# Altium PCB PCB1.PcbDoc (part 1 of 2)
Units mm, origin at the board's own origin, x right, y up, seen from the top; angles counter-clockwise.
Board outline 85.47 x 84.33 mm, 4 copper layers (Top Layer, Internal Plane 1, Internal Plane 2, Bottom Layer); 65 components, 57 nets, 335 pads, 113 vias.
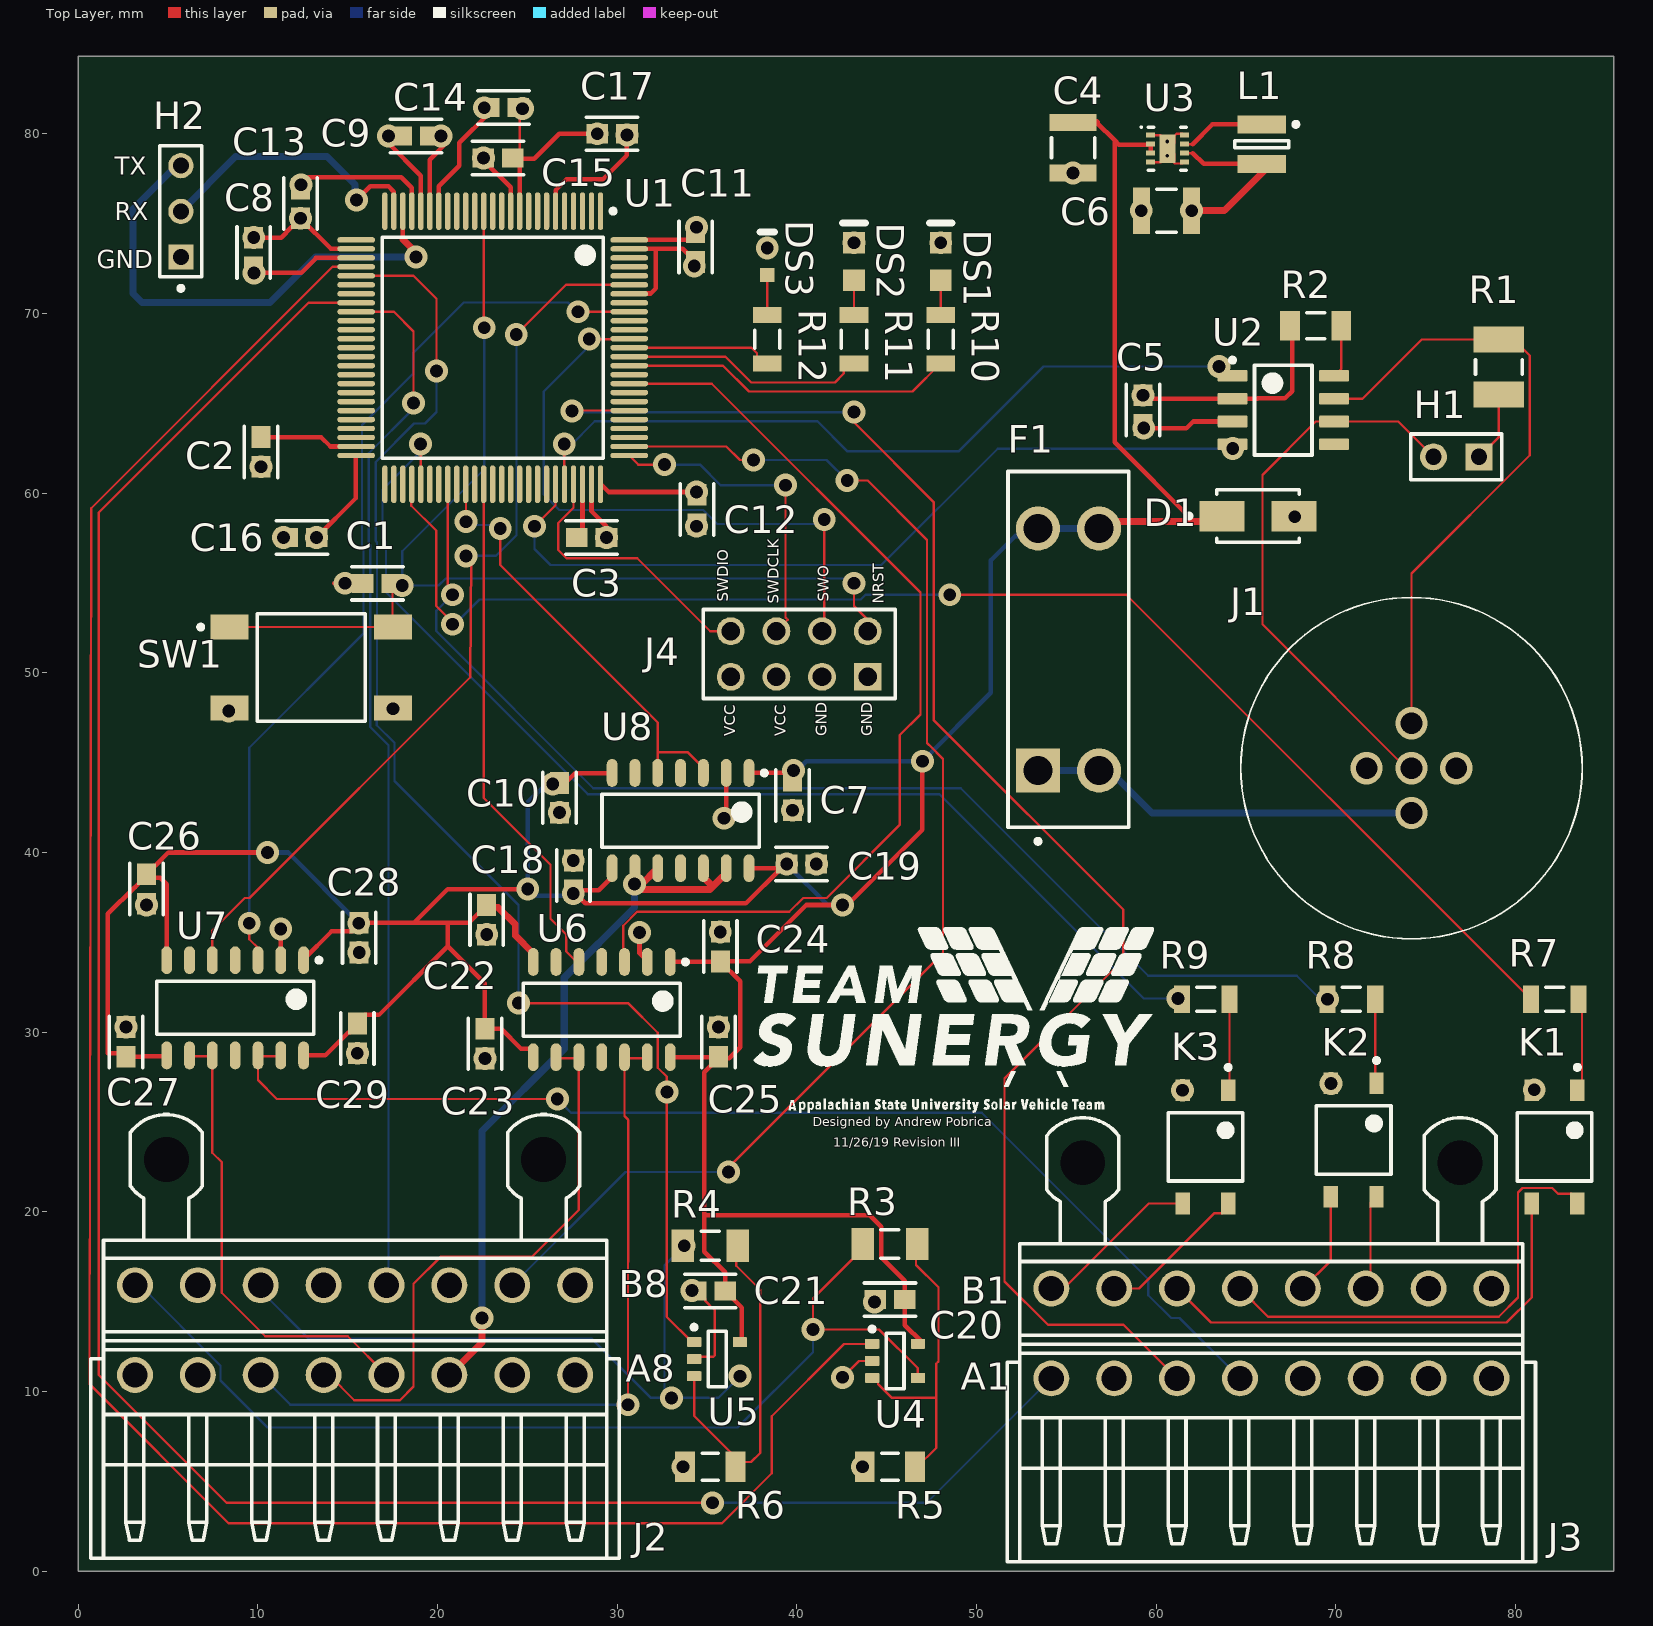
[diagram p0: Top Layer view]
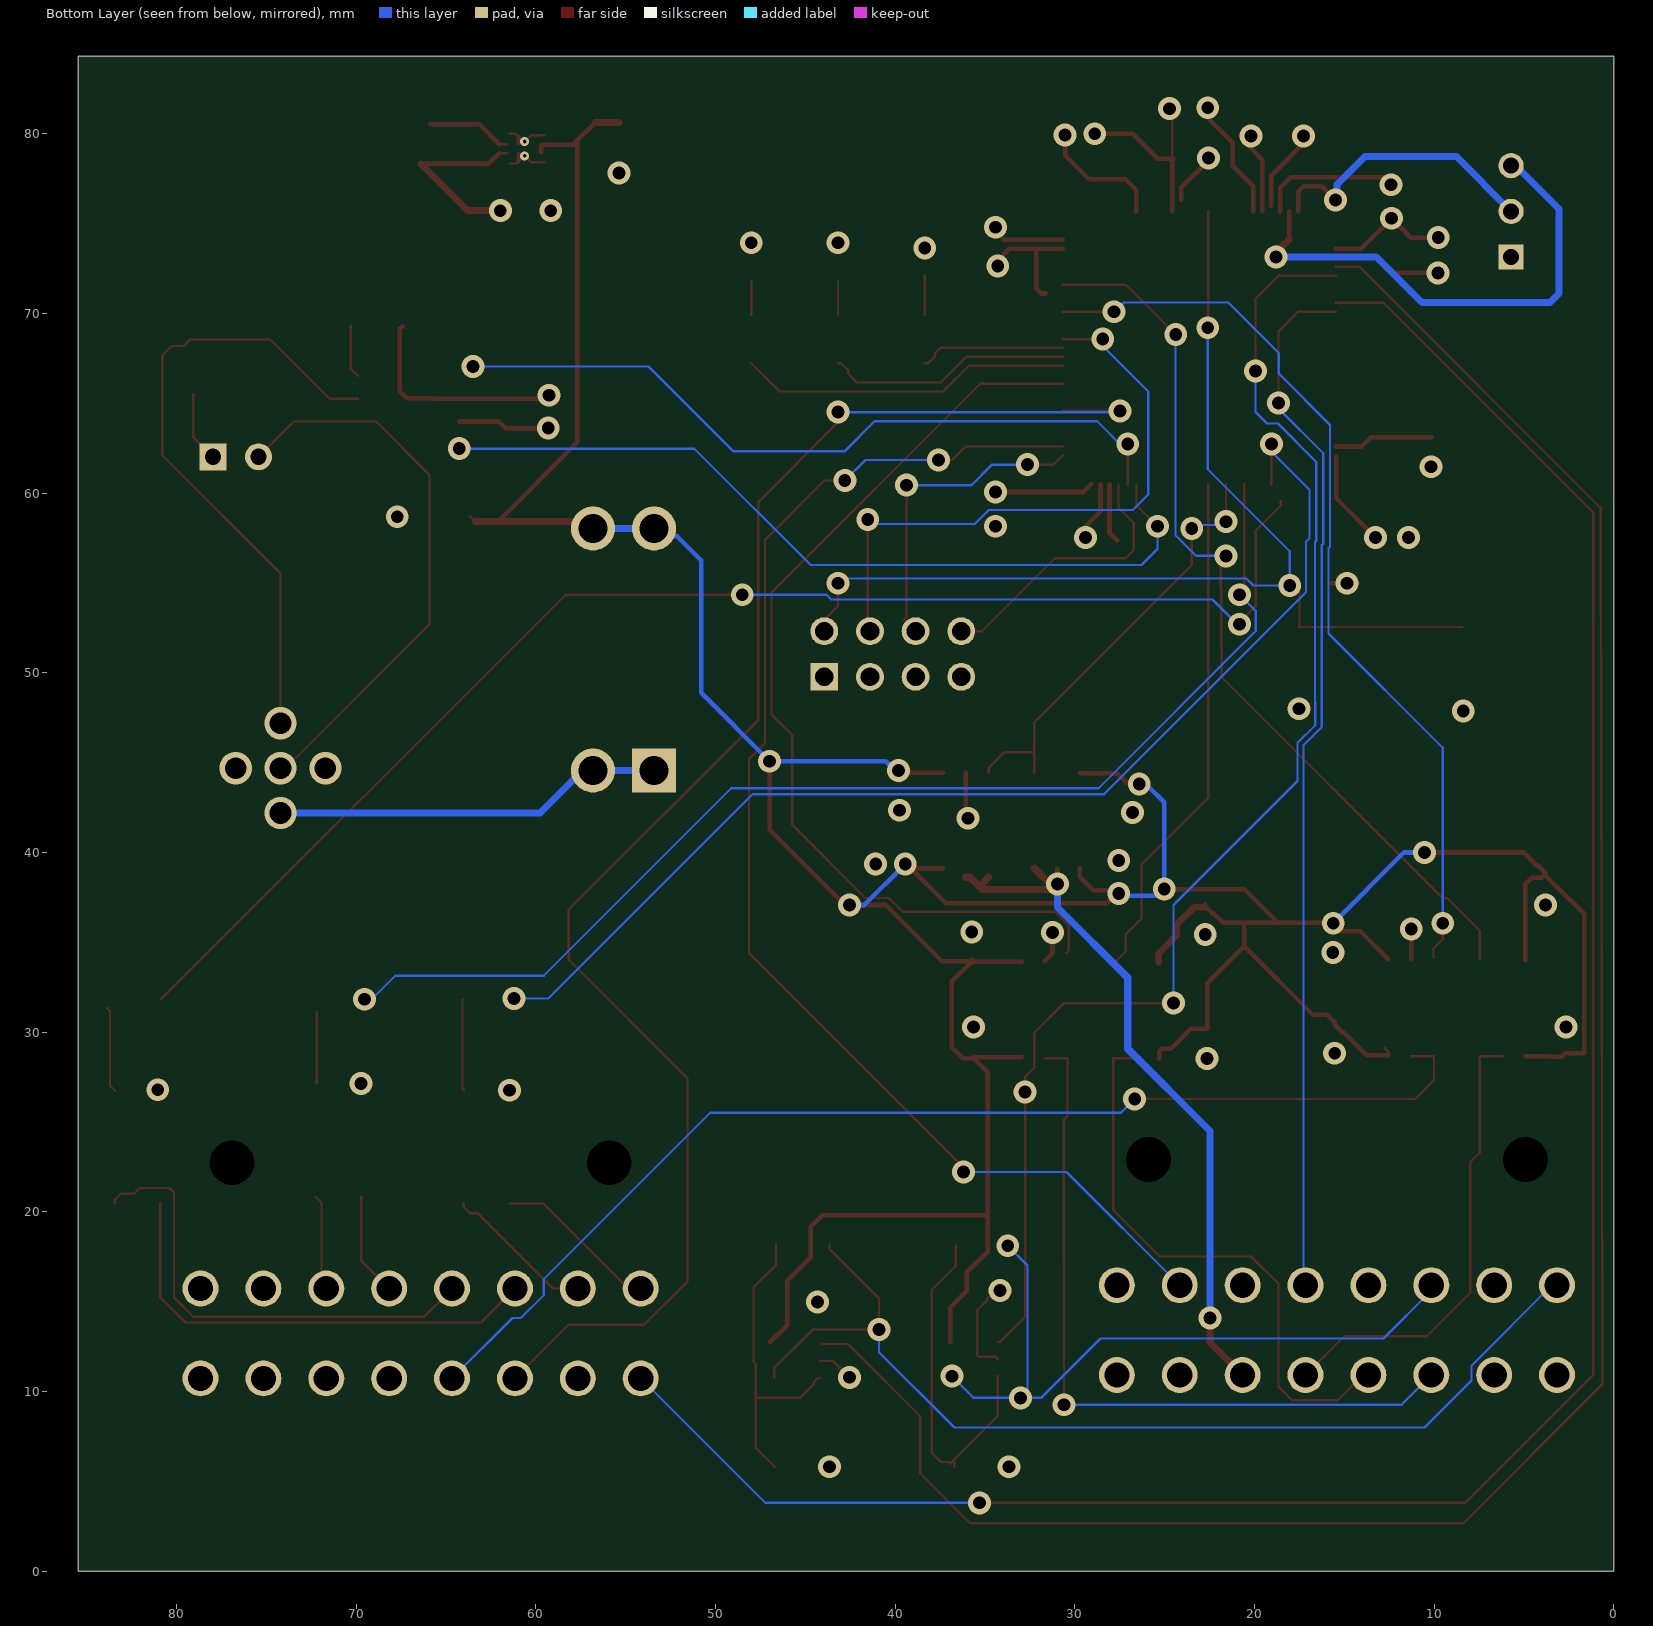
[diagram p1: Bottom Layer view, seen from below]
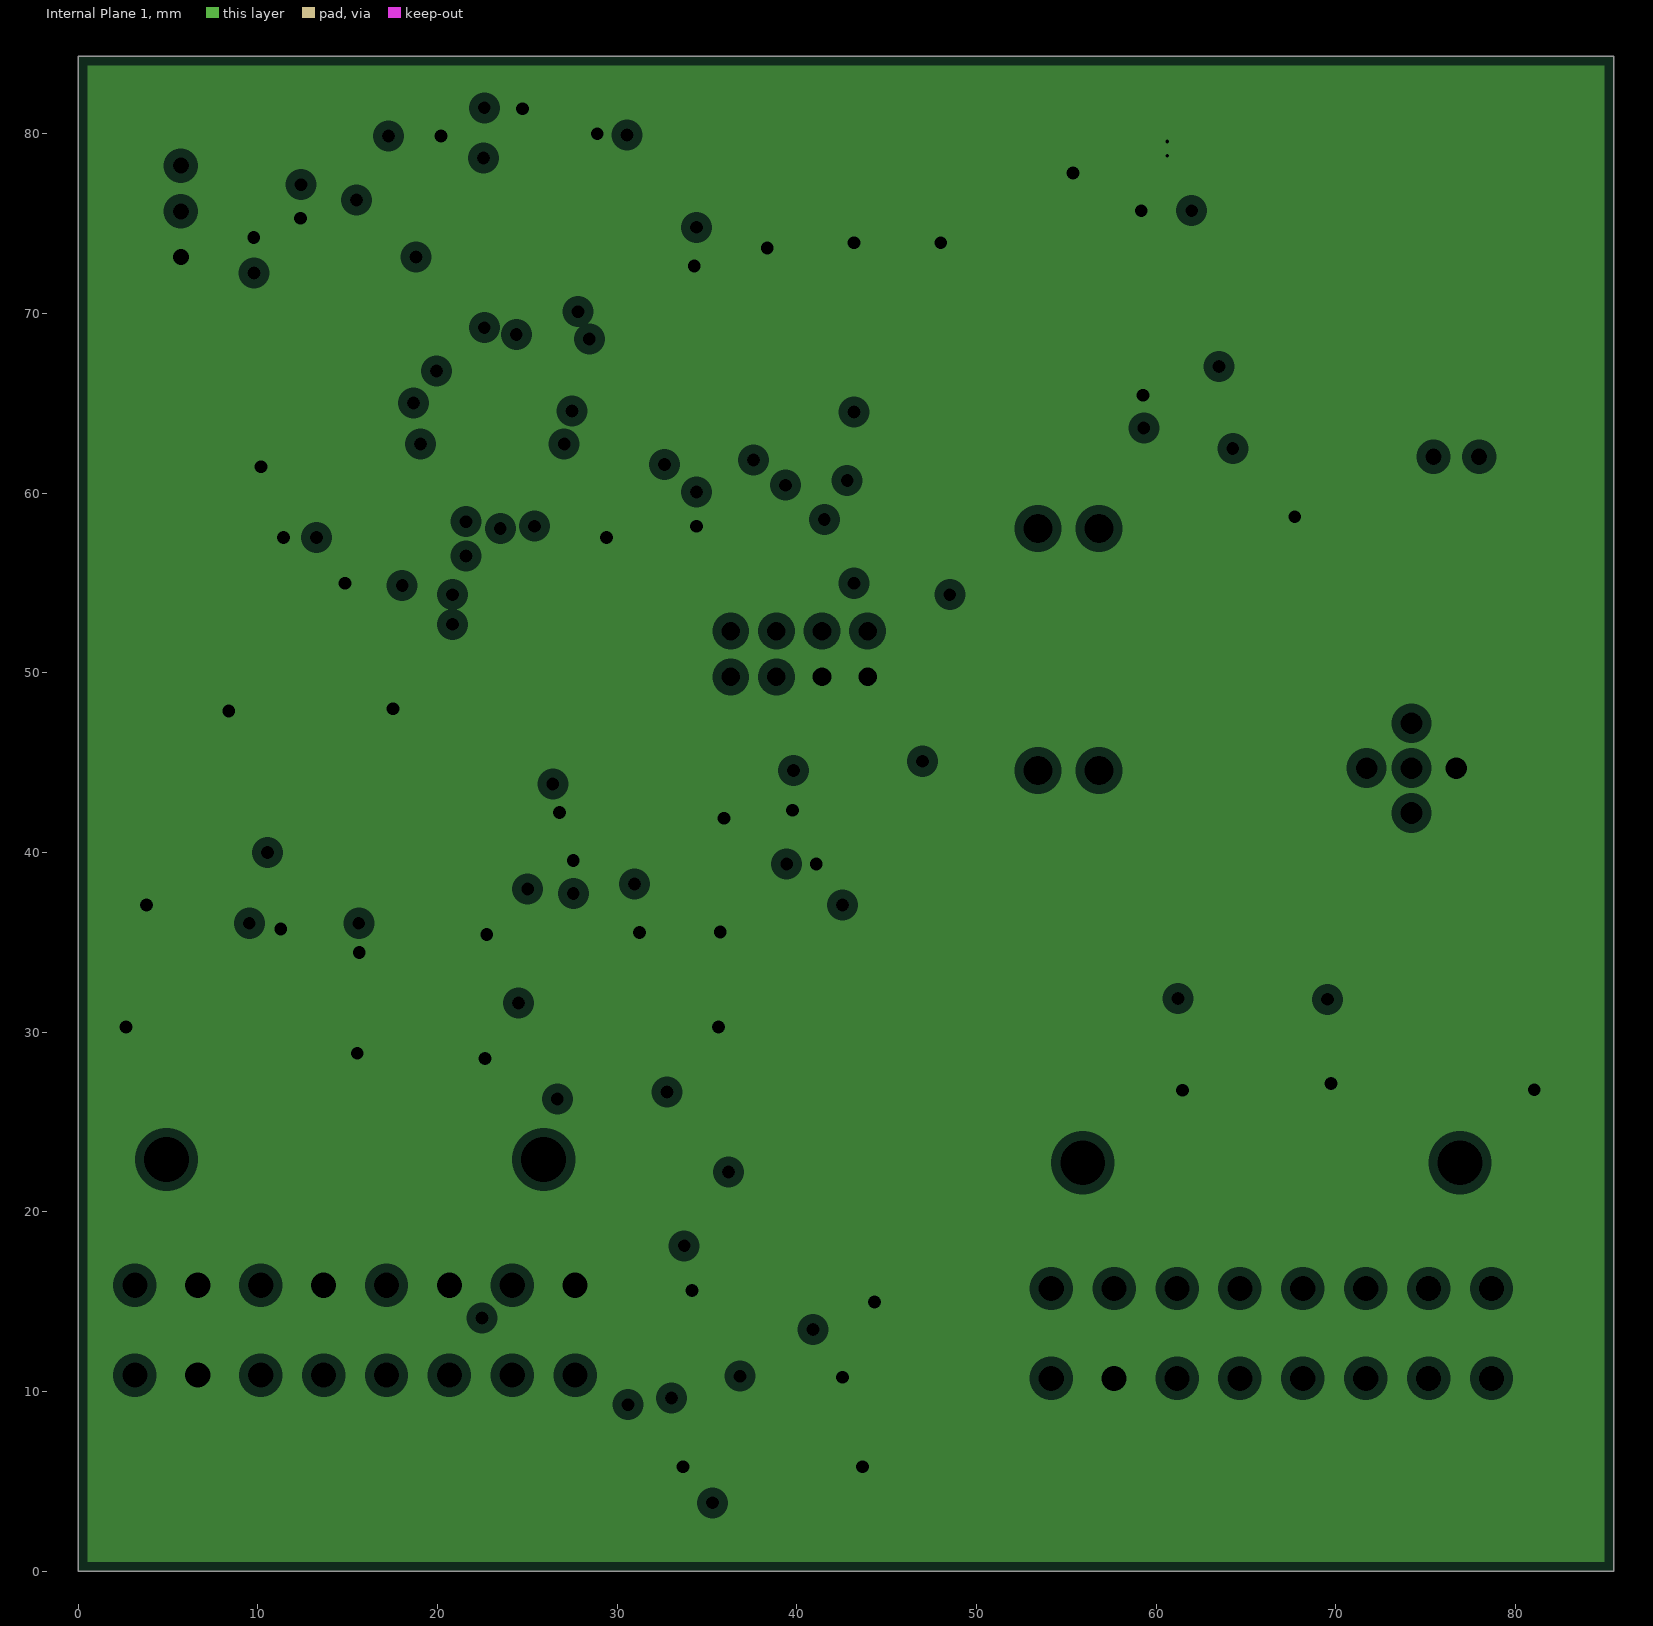
[diagram p2: Internal Plane 1, clearances drawn from the general rule]
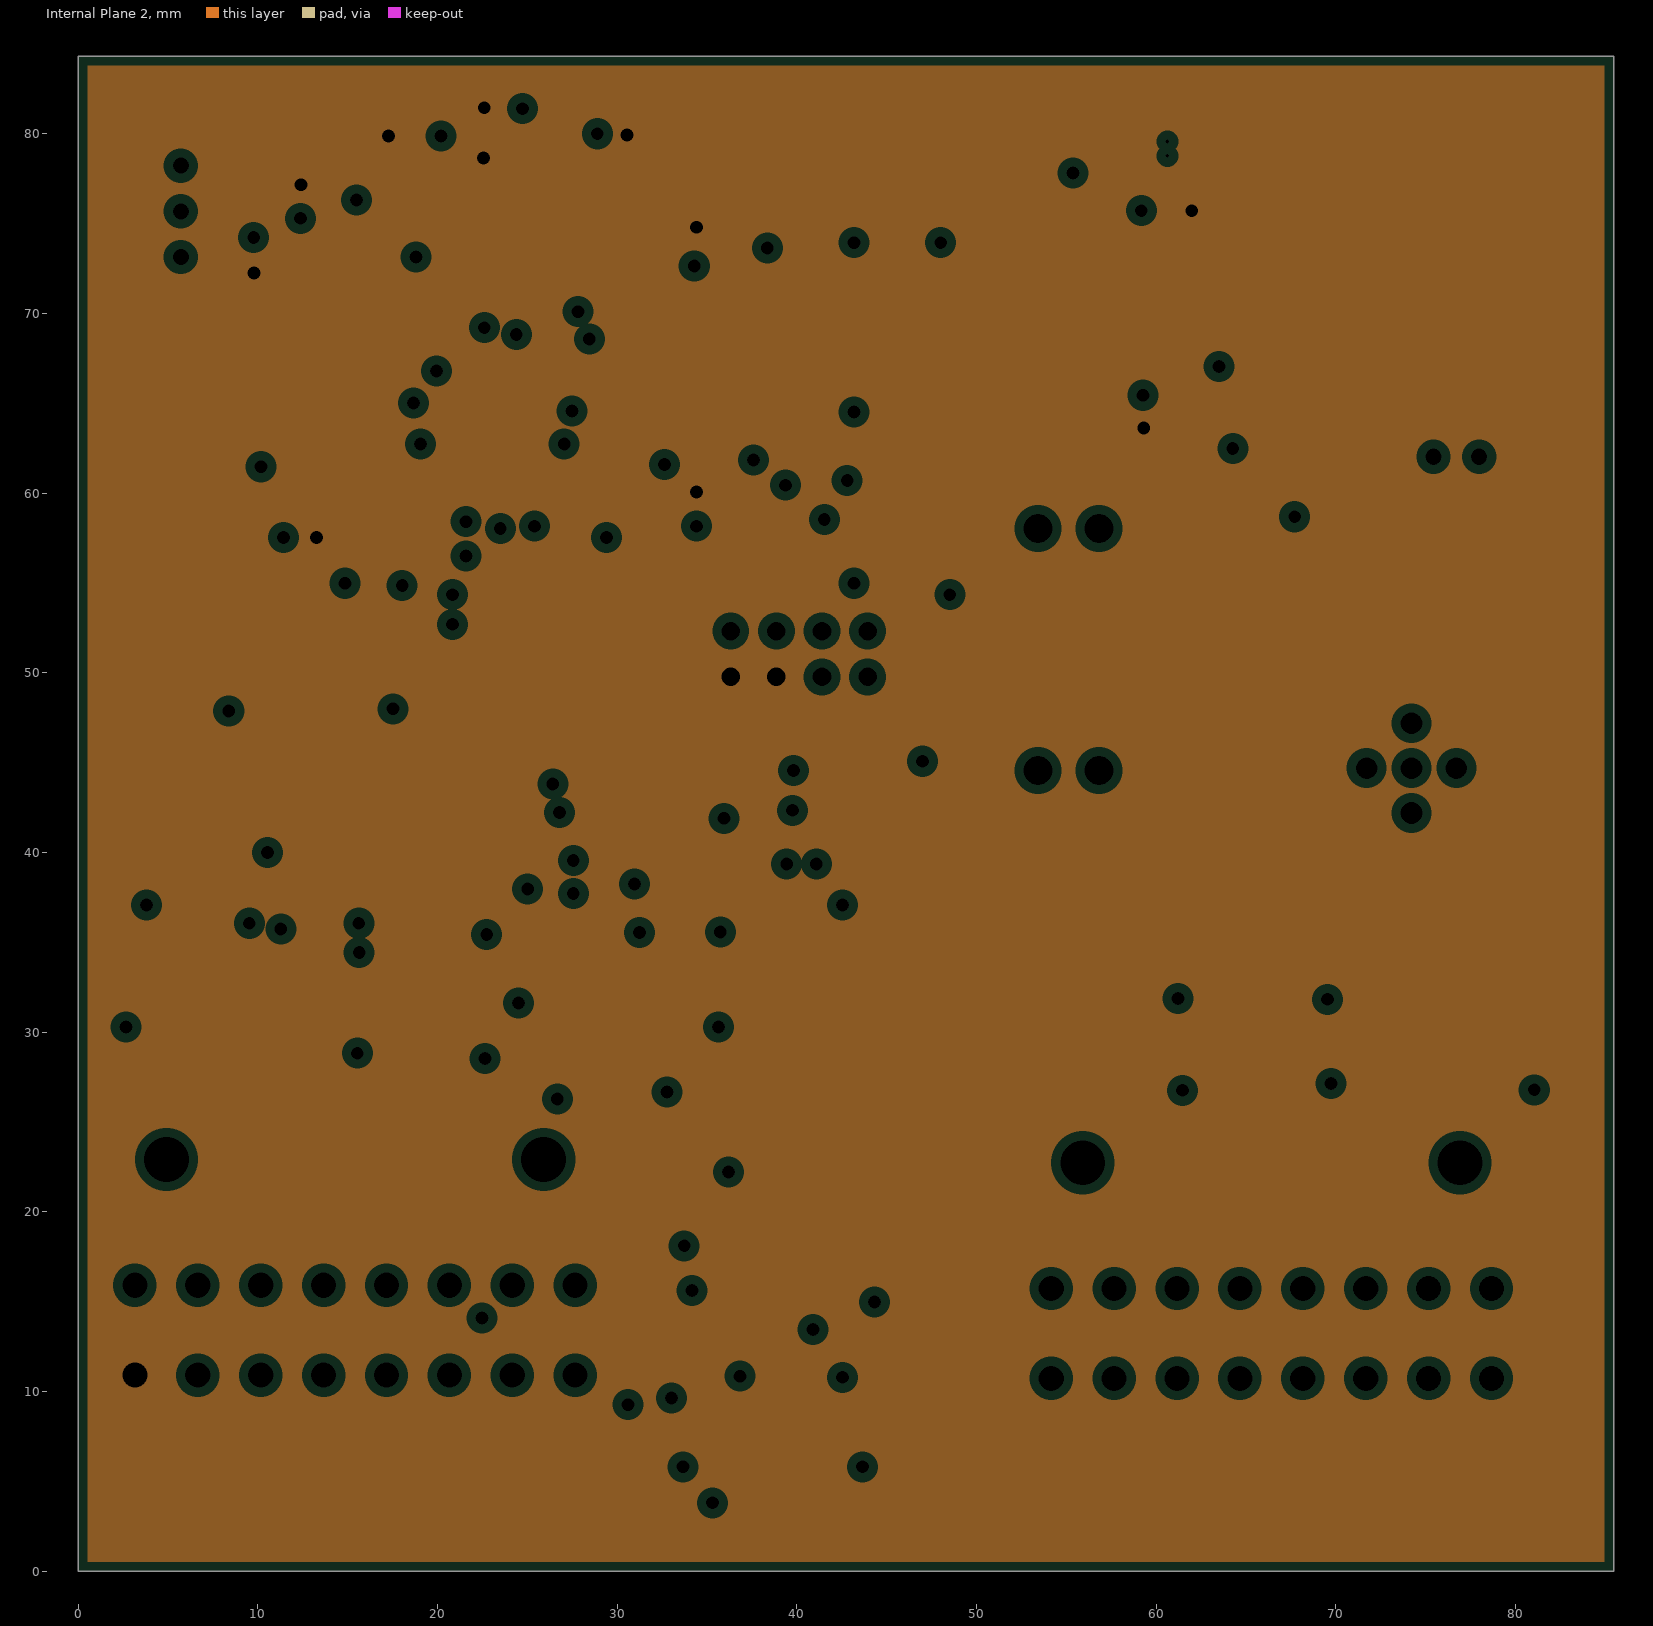
[diagram p3: Internal Plane 2, clearances drawn from the general rule]

## Layer stack, top to bottom
Top Solder: solder mask 0.0102, Solder Resist, Dk 3.5
Top Layer: signal copper 0.0356
Dielectric 1: dielectric 0.32, FR-4, Dk 4.8
Internal Plane 1: plane copper 0.035, net GND
Dielectric2: dielectric 0.32, FR-4, Dk 4.8
Internal Plane 2: plane copper 0.035, net VCC
Dielectric3: dielectric 0.32, FR-4, Dk 4.8
Bottom Layer: signal copper 0.0356
Bottom Solder: solder mask 0.0102, Solder Resist, Dk 3.5

## Board outline
0,0 85.471,0 85.471,84.328 0,84.328

## Design rules (kind name [scope] priority, off if disabled: settings)
BoardOutlineClearance [All] p1: gap=0.2 ignorepadtopadclearanceinfootprint=FALSE except(0.4: Arc-SplitBarrior Arc-SplitContinuation Track-SplitBarrior Track-SplitContinuation SMDPad-SplitBarrior SMDPad-SplitContinuation THPad-SplitBarrior THPad-SplitContinuation Via-SplitBarrior Via-SplitContinuation Fill-SplitBarrior Fill-SplitContinuation Poly-SplitBarrior Poly-SplitContinuation Region-SplitBarrior Region-SplitContinuation Text-SplitBarrior Text-SplitContinuation)
Clearance "Clearance Bottom Layer" [OnLayer('Bottom Layer')] p1: gap=0.203 ignorepadtopadclearanceinfootprint=TRUE except(0.254: Arc-Text Track-Text SMDPad-Text THPad-Text Via-Text Fill-Text Poly-Text Region-Text Text-Text)
Clearance "Clearance Top Layer" [OnLayer('Top Layer')] p2: gap=0.203 ignorepadtopadclearanceinfootprint=TRUE except(0.254: Arc-Text Track-Text SMDPad-Text THPad-Text Via-Text Fill-Text Poly-Text Region-Text Text-Text)
Clearance [All] p3: gap=0.2 ignorepadtopadclearanceinfootprint=FALSE except(0.089: Arc-Arc Arc-Track Arc-SMDPad Track-Track Track-SMDPad SMDPad-SMDPad; 0.127: Arc-Via Track-Via SMDPad-Via THPad-Via Via-Via; 0.254: Arc-Text Track-Text SMDPad-Text THPad-Text Via-Text Fill-Text Poly-Text Region-Text Text-Text)
HoleSize [All] p1: absolutevalues=TRUE maxlimit=6.3 minlimit=0.2 maxpercent=80.000 minpercent=20.000
HoleToHoleClearance CAN_CONNCTOR [InComponent('J1') vs InComponent('J1')] p1: gap=0 allowstackedmicrovias=TRUE
HoleToHoleClearance [All] p2: gap=0.254 allowstackedmicrovias=TRUE
MinimumAnnularRing [All] p1: minimumring=0.076
MinimumSolderMaskSliver MinimumSolderMaskSliver_1 [HasFootprint('DSG8-1600X900TP') vs HasFootprint('DSG8-1600X900TP')] p1: minsoldermaskwidth=0.025
MinimumSolderMaskSliver [All] p2: minsoldermaskwidth=0.1
PlaneClearance [All] p1: clearance=0.508
PlaneConnect [All] p1: planeconnectstyle=Relief reliefexpansion=0.508 reliefentries=4 reliefconductorwidth=0.254 reliefairgap=0.254
PolygonConnect PolygonConnect_1 [All] p1: thpad.connectstyle=Relief thpad.reliefconductorwidth=0.508 thpad.reliefentries=4 thpad.polygonreliefangle="90 Angle" thpad.airgapwidth=0.254 smdpad.connectstyle=Relief smdpad.reliefconductorwidth=0.508 smdpad.reliefentries=4 smdpad.polygonreliefangle="90 Angle" smdpad.airgapwidth=0.254 via.connectstyle=Direct via.reliefconductorwidth=0.508 via.reliefentries=4 via.polygonreliefangle="90 Angle" via.airgapwidth=0.254
PolygonConnect [All] p2: connectstyle=Relief reliefconductorwidth=0.254 reliefentries=4 polygonreliefangle="90 Angle" airgapwidth=0.254
RoomDefinition Connector [InComponentClass('Connector')] p1: confinementstyle=ConfineIn formatcopy=TRUE lockcomponents=FALSE outline -2.413,0.127 81.534,0.127 81.534,25.781 -2.413,25.781
RoomDefinition CAN [InComponentClass('CAN')] p2: confinementstyle=ConfineIn formatcopy=TRUE lockcomponents=FALSE outline 49.673,33.401 85.217,33.401 85.217,71.73 49.673,71.73
RoomDefinition Microcontroller [InComponentClass('Microcontroller')] p3: confinementstyle=ConfineIn formatcopy=TRUE lockcomponents=FALSE outline -0.83,44.102 49.845,44.102 49.845,83.802 -0.83,83.802
RoomDefinition PowerSupply [InComponentClass('PowerSupply')] p4: confinementstyle=ConfineIn formatcopy=TRUE lockcomponents=FALSE outline 52.273,70.83 82.373,70.83 82.373,83.83 52.273,83.83
RoomDefinition ICs [InComponentClass('ICs')] p5: confinementstyle=ConfineIn formatcopy=TRUE lockcomponents=FALSE outline 0.762,4.318 84.709,4.318 84.709,80.772 0.762,80.772
RoutingCorners [All] p1: cornerstyle=Round minsetback=2.54 maxsetback=2.54
RoutingVias [All] p1: holewidth=0.5 width=1 viastyle="Through Hole" minholewidth=0.2 minwidth=0.45 maxholewidth=1 maxwidth=2
SMDNeckDown [All] p1: percent=100.000
SilkToSilkClearance [All] p1: silktosilkclearance=0.1
SilkToSolderMaskClearance [IsPad] p1: minsilkscreentomaskgap=0.1 clearancetoexposedcopper=TRUE
SolderMaskExpansion [All] p1: expansion=0.102
Width POWER [InNetClass('Power')] p1: maxlimit=0.5 minlimit=0.102 preferedwidth=0.254 minimp=50.000000 maximp=50.000000 favimp=50.000000
Width [All] p2: maxlimit=2.54 minlimit=0.127 preferedwidth=0.127 minimp=50.000000 maximp=50.000000 favimp=50.000000
22 further rules are at their usual default settings.

## Classes and differential pairs
net class Power: +12 GND NetJ2_A6 NetL1_1 VCC
component class PowerSupply: C4 C6 L1 U3
component class Microcontroller: C1 C2 C3 C8 C9 C11 C12 C13 C14 C15 C16 C17 DS1 DS2 DS3 H2 J4 R10 R11 R12 SW1 U1
component class ICs: C7 C10 C18 C19 C20 C21 C22 C23 C24 C25 C26 C27 C28 C29 K1 K2 K3 R3 R4 R5 R6 R7 R8 R9 U4 U5 U6 U7 U8
component class Connector: J2 J3
component class CAN: C5 D1 F1 H1 J1 R1 R2 U2

## Components (designator, comment, footprint, x,y, rotation, side; value= is the part's Value field where it differs from the comment)
C1 "C0603C104K5RACTU" Kemet_C0603_IPC_A 16.67,54.99 r180 top
C2 "CC0805KKX7R6BB225" Kemet_C0603_IPC_A 10.17,62.302 r270 top
C3 "CC0805KKX7R6BB225" Kemet_C0603_IPC_A 28.575,57.531 r0 top
C4 "CAP 22uF 16V X7R 1210(3225)" CAPC1210(3225)280_L 55.373,79.23 r90 top value=22uF
C5 "C0603C104K5RACTU" Kemet_C0603_IPC_A 59.273,64.63 r90 top
C6 "CAP 22uF 16V X7R 1210(3225)" CAPC1210(3225)280_L 60.573,75.73 r0 top value=22uF
C7 "C0603C104K5RACTU" Kemet_C0603_IPC_A 39.751,43.18 r270 top
C8 "C0603C104K5RACTU" Kemet_C0603_IPC_A 9.77,73.402 r270 top
C9 "C0603C104K5RACTU" Kemet_C0603_IPC_A 18.796,79.883 r180 top
C10 "C0603C104K5RACTU" Kemet_C0603_IPC_A 26.797,43.053 r270 top
C11 "C0603C104K5RACTU" Kemet_C0603_IPC_A 34.37,73.702 r90 top
C12 "C0603C104K5RACTU" Kemet_C0603_IPC_A 34.441,59.1 r90 top
C13 "C0603C104K5RACTU" Kemet_C0603_IPC_A 12.37,76.128 r90 top
C14 "C0603C104K5RACTU" Kemet_C0603_IPC_A 23.67,81.469 r0 top
C15 "C0603C104K5RACTU" Kemet_C0603_IPC_A 23.368,78.66 r0 top
C16 "C0603C104K5RACTU" Kemet_C0603_IPC_A 12.446,57.544 r180 top
C17 "C0603C104K5RACTU" Kemet_C0603_IPC_A 29.718,80.01 r180 top
C18 "C0603C104K5RACTU" Kemet_C0603_IPC_A 27.559,38.735 r90 top
C19 "C0603C104K5RACTU" Kemet_C0603_IPC_A 40.259,39.37 r0 top
C20 "C0603C104K5RACTU" Kemet_C0603_IPC_A 45.181,15.117 r180 top
C21 "C0603C104K5RACTU" Kemet_C0603_IPC_A 35.181,15.608 r180 top
C22 "C0603C104K5RACTU" Kemet_C0603_IPC_A 22.739,36.263 r270 top
C23 "C0603C104K5RACTU" Kemet_C0603_IPC_A 22.639,29.363 r270 top
C24 "C0603C104K5RACTU" Kemet_C0603_IPC_A 35.739,34.763 r90 top
C25 "C0603C104K5RACTU" Kemet_C0603_IPC_A 35.639,29.463 r90 top
C26 "C0603C104K5RACTU" Kemet_C0603_IPC_A 3.81,37.973 r270 top
C27 "C0603C104K5RACTU" Kemet_C0603_IPC_A 2.667,29.464 r90 top
C28 "C0603C104K5RACTU" Kemet_C0603_IPC_A 15.639,35.263 r270 top
C29 "C0603C104K5RACTU" Kemet_C0603_IPC_A 15.539,29.663 r270 top
D1 "S1J-13-F" Diodes_SMA_0 65.673,58.73 r0 top
DS1 "HSMD-C170" AVAG-HSMX-C170_V 48.006,72.898 r90 top
DS2 "HSMG-C170" AVAG-HSMX-C170_V 43.18,72.898 r90 top
DS3 "HSMS-C190" AVAG-HSMX-C190_V 38.354,72.898 r90 top
F1 "3557-2" Keystone_3557-2_0 55.118,51.308 r90 top
H1 "Header 0" HDR1X2 77.973,62.03 r180 top
H2 "87224-3" TECO-87224-3_V 5.715,75.692 r90 top
J1 "1542761" 1542761 74.208,44.704 r0 top
J2 "1633640000" SLD_3_50_90G_16 15.42,9.582 r0 top
J3 "1633640000" SLD_3_50_90G_16 66.421,9.398 r0 top
J4 "SSW-104-02-T-D" SMTC-SSW-104-02-X-D 43.942,49.784 r180 top
K1 "TLP3123_F" Toshiba_11-5H1_0 82.169,23.622 r180 top
K2 "TLP3123_F" Toshiba_11-5H1_0 70.993,24.003 r180 top
K3 "TLP3123_F" Toshiba_11-5H1_0 62.738,23.622 r180 top
L1 "SRN3015-2R2M" BOUR-SRN3015-2_V 65.873,79.43 r270 top
R1 "ERJ-14YJ121U" RESC3225X70X50ML20T20 79.073,67.03 r270 top
R2 "ERJ-8GEYJ103V" RESC3216X70X50NL05T20 68.873,69.33 r180 top
R3 "RC1206FR-0710KL" RESC3116X65X40ML10T20 45.181,18.217 r180 top
R4 "RC1206FR-0710KL" RESC3116X65X40ML10T20 35.181,18.117 r180 top
R5 "AC1206FR-074K7L" RESC3116X65X45NL10T20 45.181,5.817 r0 top
R6 "AC1206FR-074K7L" RESC3116X65X45NL10T20 35.181,5.817 r0 top
R7 "ERJ-8GEYJ201V" RESC3216X70X50LL05T20 82.182,31.835 r0 top
R8 "ERJ-8GEYJ201V" RESC3216X70X50LL05T20 70.866,31.835 r0 top
R9 "ERJ-8GEYJ201V" RESC3216X70X50LL05T20 62.758,31.835 r0 top
R10 "CRCW120656R0FKEA" RESC3216X60X45LL10T20 48.006,68.58 r270 top
R11 "CRCW120656R0FKEA" RESC3216X60X45LL10T20 43.18,68.58 r270 top
R12 "CRCW120656R0FKEA" RESC3216X60X45LL10T20 38.354,68.58 r270 top
SW1 "TL3301AF260QG" ESWI-TL3301AF260QG_V 12.97,50.302 r0 top
U1 "STM32F407VGT6" STM-LQFP100_M 23.07,68.102 r270 top
U2 "SN65HVD230D" D0008A_M 67.073,64.63 r0 top
U3 "TPS62172DSGR" DSG8-1600X900TP 60.623,79.18 r0 top
U4 "LM321MF/NOPB" DBV0005A_L 45.466,11.708 r0 top
U5 "LM321MF/NOPB" DBV0005A_L 35.56,11.811 r0 top
U6 "BTS4160DGA" INF-PG-DSO-14-37_N 29.139,31.263 r270 top
U7 "BTS4160DGA" INF-PG-DSO-14-37_N 8.739,31.363 r270 top
U8 "BTS4160DGA" INF-PG-DSO-14-37_N 33.528,41.783 r270 top

## Footprints (in the part's own frame and the unit in brackets; to place one, negate y for a bottom-side part, rotate by r counter-clockwise, add the part's x,y. Pads: shape width x height; smd on the part's side, far side on the other; paste and mask are expansions set on the pad)
1542761 [mm]
  round 1.8 hole 1.2: 1(-2.5,0) 2(0,-2.5) 3(2.5,0) 4(0,2.5) 5(0,0)
  silkscreen extent -9.5,-9.5 9.5,9.5
AVAG-HSMX-C170_V [mm] "SMD, 2-Leads, Body 2x1.25mm, Height 0.8mm"
  rect 1.2x1.2 smd: 1(-1.05,0) 2(1.05,0)
  silkscreen extent 2.15,-0.63 2.15,0.63, body extent -1,-0.63 1,0.63, height 0.8
AVAG-HSMX-C190_V [mm] "SMD, 2-Leads, Body 1.6x0.8mm, Height 0.9mm"
  rect 0.8x0.8 smd: 1(-0.75,0) 2(0.75,0)
  silkscreen extent 1.65,-0.4 1.65,0.4, body extent -0.8,-0.4 0.8,0.4, height 0.9
BOUR-SRN3015-2_V [mm] "SMD, 2-Leads, Body 3x3mm, Height 1.5mm"
  rect 1x2.7 smd: 1(-1.1,0) 2(1.1,0)
  silkscreen extent -1.22,-1.5 0.2,2.03, body extent -1.5,-1.5 1.5,1.5, height 1.5
CAPC1210(3225)280_L [mm] "Chip Capacitor, Body 3.2x2.5mm, Height 2.8mm, IPC High Density"
  rect 0.95x2.6 smd: 1(-1.4,0) 2(1.4,0)
  silkscreen extent -0.55,-1.2 0.55,1.2, body extent -1.7,-1.4 1.7,1.4, height 2.8
D0008A_M [mm] "SOIC, 8-Leads, Body 5x4mm, Pitch 1.27mm, IPC Low Density"
  rrect15% 1.65x0.65 smd: 1(-2.825,1.905) 2(-2.825,0.635) 3(-2.825,-0.635) 4(-2.825,-1.905) 5(2.825,-1.905) 6(2.825,-0.635) 7(2.825,0.635) 8(2.825,1.905)
  silkscreen extent -2.95,-2.5 1.6,2.9, body extent -3,-2.45 3,2.45, height 1.63
DBV0005A_L [mm] "SOT23, 5-Leads, Body 3.05x1.75mm, Pitch 0.95mm, IPC High Density"
  rrect18% 0.8x0.55 smd: 1(-1.275,0.95) 2(-1.275,0) 3(-1.275,-0.95) 4(1.275,-0.95) 5(1.275,0.95)
  silkscreen extent -1.4,-1.55 0.5,1.9, body extent -1.42,-1.46 1.42,1.46, height 1.08
Diodes_SMA_0 [mm]
  rect 2.5x1.7 smd paste+0 mask+0: 1(-2,0) 2(2,0)
  silkscreen extent -3.97,-1.46 2.3,1.46, body extent -3.35,-1.56 3.35,1.56, height 0.25
DSG8-1600X900TP [mm] "SON, 8-Leads, Body 2x2mm, Pitch 0.5mm, Thermal Pad 1.6x0.9mm, TI Recommended"
  rect 0.5x0.28 smd paste-0.14 mask+0.07: 1(-0.95,0.75) 2(-0.95,0.25) 3(-0.95,-0.25) 4(-0.95,-0.75) 5(0.95,-0.75) 6(0.95,-0.25) 7(0.95,0.25) 8(0.95,0.75)
  rect 0.9x1.6 smd paste-0.45 mask+0.07: 9(0,0)
  silkscreen extent -1.5,-1.2 1.05,1.25, body extent -1.05,-1.05 1.05,1.05, height 0.8
ESWI-TL3301AF260QG_V [mm] "SMD, 4-Leads, Body 6x6mm"
  rect 2.1x1.4 smd: 1(-4.55,2.25) 2(4.55,2.25) 3(-4.55,-2.25) 4(4.55,-2.25)
  silkscreen extent -6.27,-3 3,3, body extent -3,-3 3,3, height 5.3
HDR1X2 [mm] "Connector; Header; 2 Position"
  rect 1.5x1.5 hole 0.9: 1(0,0)
  round 1.5 hole 0.9: 2(2.54,0)
  silkscreen extent -1.27,-1.27 3.81,1.27
INF-PG-DSO-14-37_N [mm] "SOP, 14-Leads, Body 8.65x3.9mm, Pitch 1.27mm, IPC Medium Density"
  oval 1.55x0.6 smd: 1(-2.65,3.81) 2(-2.65,2.54) 3(-2.65,1.27) 4(-2.65,0) 5(-2.65,-1.27) 6(-2.65,-2.54) 7(-2.65,-3.81) 8(2.65,-3.81) 9(2.65,-2.54) 10(2.65,-1.27) 11(2.65,0) 12(2.65,1.27) 13(2.65,2.54) 14(2.65,3.81)
  silkscreen extent -2.77,-4.38 1.48,4.79, body extent -2,-4.38 2,4.38, height 1.75
Kemet_C0603_IPC_A [mm]
  rect 1.206x1.058 smd paste+0 mask+0: 1(-0.826,0) 2(0.826,0)
  silkscreen extent -1.43,-0.93 1.43,0.93
Keystone_3557-2_0 [mm]
  rect 2.45x2.45 hole 1.6 paste-1000 mask+0: 1(-6.735,1.7)
  round 2.45 hole 1.6 paste-1000 mask+0: 2(6.735,1.7) 3(-6.735,-1.7) 4(6.735,-1.7)
  silkscreen extent -10.8,-3.36 9.9,3.36, body extent -10.08,-3.54 10.08,3.54, height 0.25
RESC3116X65X40ML10T20 [mm] "Chip Resistor, 2-Leads, Body 3.10x1.60mm, IPC Low Density"
  rect 1.25x1.8 smd: 1(-1.525,0) 2(1.525,0)
  silkscreen extent -0.5,-0.8 0.5,0.8, body extent -1.6,-0.85 1.6,0.85, height 0.65
RESC3116X65X45NL10T20 [mm] "Chip Resistor, 2-Leads, Body 3.10x1.60mm, IPC Medium Density"
  rect 1.1x1.7 smd: 1(-1.4,0) 2(1.4,0)
  silkscreen extent -0.45,-0.75 0.45,0.75, body extent -1.6,-0.85 1.6,0.85, height 0.65
RESC3216X60X45LL10T20 [mm] "Chip Resistor, 2-Leads, Body 3.20x1.60mm, IPC High Density"
  rect 0.9x1.6 smd: 1(-1.35,0) 2(1.35,0)
  silkscreen extent -0.5,-0.7 0.5,0.7, body extent -1.65,-0.85 1.65,0.85, height 0.6
RESC3216X70X50LL05T20 [mm] "Chip Resistor, 2-Leads, Body 3.20x1.60mm, IPC High Density"
  rect 0.9x1.55 smd: 1(-1.325,0) 2(1.325,0)
  silkscreen extent -0.5,-0.67 0.5,0.67, body extent -1.63,-0.82 1.62,0.82, height 0.7
RESC3216X70X50NL05T20 [mm] "Chip Resistor, 2-Leads, Body 3.20x1.60mm, IPC Medium Density"
  rect 1.1x1.65 smd: 1(-1.425,0) 2(1.425,0)
  silkscreen extent -0.5,-0.72 0.5,0.73, body extent -1.63,-0.82 1.62,0.82, height 0.7
RESC3225X70X50ML20T20 [mm] "Chip Resistor, 2-Leads, Body 3.20x2.50mm, IPC Low Density"
  rect 1.45x2.8 smd: 1(-1.525,0) 2(1.525,0)
  silkscreen extent -0.4,-1.3 0.4,1.3, body extent -1.7,-1.35 1.7,1.35, height 0.7
SLD_3_50_90G_16 [mm] "OMNIMATE Signal - Serie BL/SL 3.50  SLD 3.50/16/90G 3.2"
  round 0 hole 2.5 unplated: 0(-10.51,13.34) 0(10.49,13.34)
  round 2 hole 1.4: A1(-12.26,1.34) A2(-8.76,1.34) A3(-5.26,1.34) A4(-1.76,1.34) A5(1.74,1.34) A6(5.24,1.34) A7(8.74,1.34) A8(12.24,1.34) B1(-12.26,6.34) B2(-8.76,6.34) B3(-5.26,6.34) B4(-1.76,6.34) B5(1.74,6.34) B6(5.24,6.34) B7(8.74,6.34) B8(12.24,6.34)
  silkscreen extent -14.71,-8.86 14.69,15.84, body extent -14.71,-8.86 14.69,15.82, height 23.31
SMTC-SSW-104-02-X-D [mm] "SQ Post Socket, 2x4 Pins, Vertical, 2.54mm Pitch, Female"
  rect 1.55x1.55 hole 1.04: 1(0,0)
  round 1.55 hole 1.04: 2(0,-2.54) 3(2.54,0) 4(2.54,-2.54) 5(5.08,0) 6(5.08,-2.54) 7(7.62,0) 8(7.62,-2.54)
  silkscreen extent -1.53,-3.74 9.15,1.2, body extent -1.52,-3.75 9.14,1.21, height 8.51
STM-LQFP100_M [mm] "Thin QFP, 100-Leads, Body 14x14mm, Pitch 0.5mm, IPC Low Density"
  oval 2.1x0.3 smd: 1(-7.6,6) 2(-7.6,5.5) 3(-7.6,5) 4(-7.6,4.5) 5(-7.6,4) 6(-7.6,3.5) 7(-7.6,3) 8(-7.6,2.5) 9(-7.6,2) 10(-7.6,1.5) 11(-7.6,1) 12(-7.6,0.5) 13(-7.6,0) 14(-7.6,-0.5) 15(-7.6,-1) 16(-7.6,-1.5) 17(-7.6,-2) 18(-7.6,-2.5) 19(-7.6,-3) 20(-7.6,-3.5) 21(-7.6,-4) 22(-7.6,-4.5) 23(-7.6,-5) 24(-7.6,-5.5) 25(-7.6,-6) 51(7.6,-6) 52(7.6,-5.5) 53(7.6,-5) 54(7.6,-4.5) 55(7.6,-4) 56(7.6,-3.5) 57(7.6,-3) 58(7.6,-2.5) 59(7.6,-2) 60(7.6,-1.5) 61(7.6,-1) 62(7.6,-0.5) 63(7.6,0) 64(7.6,0.5) 65(7.6,1) 66(7.6,1.5) 67(7.6,2) 68(7.6,2.5) 69(7.6,3) 70(7.6,3.5) 71(7.6,4) 72(7.6,4.5) 73(7.6,5) 74(7.6,5.5) 75(7.6,6)
  oval 0.3x2.1 smd: 26(-6,-7.6) 27(-5.5,-7.6) 28(-5,-7.6) 29(-4.5,-7.6) 30(-4,-7.6) 31(-3.5,-7.6) 32(-3,-7.6) 33(-2.5,-7.6) 34(-2,-7.6) 35(-1.5,-7.6) 36(-1,-7.6) 37(-0.5,-7.6) 38(0,-7.6) 39(0.5,-7.6) 40(1,-7.6) 41(1.5,-7.6) 42(2,-7.6) 43(2.5,-7.6) 44(3,-7.6) 45(3.5,-7.6) 46(4,-7.6) 47(4.5,-7.6) 48(5,-7.6) 49(5.5,-7.6) 50(6,-7.6) 76(6,7.6) 77(5.5,7.6) 78(5,7.6) 79(4.5,7.6) 80(4,7.6) 81(3.5,7.6) 82(3,7.6) 83(2.5,7.6) 84(2,7.6) 85(1.5,7.6) 86(1,7.6) 87(0.5,7.6) 88(0,7.6) 89(-0.5,7.6) 90(-1,7.6) 91(-1.5,7.6) 92(-2,7.6) 93(-2.5,7.6) 94(-3,7.6) 95(-3.5,7.6) 96(-4,7.6) 97(-4.5,7.6) 98(-5,7.6) 99(-5.5,7.6) 100(-6,7.6)
  silkscreen extent -7.72,-6.15 6.15,6.83, body extent -7,-7 7,7, height 1.6
TECO-87224-3_V [mm] "THD, 3-Leads, Body 7.21x2.31mm, Pitch 2.54mm"
  rect 1.4x1.4 hole 0.889: 1(-2.54,0)
  round 1.4 hole 0.889: 2(0,0) 3(2.54,0)
  silkscreen extent -4.41,-1.17 3.64,1.17, body extent -3.61,-1.17 3.61,1.17, height 10.36
Toshiba_11-5H1_0 [mm]
  rect 0.8x1.2 smd paste+0 mask+0: 1(-1.27,-3.15) 2(1.27,-3.15) 3(1.27,3.15) 4(-1.27,3.15)
  silkscreen extent -2.07,-4.55 2.07,1.9, body extent -2.17,-3.85 2.17,3.85, height 0.25

## Part data
C2 C3: "2.2UF"
C4 C6: library part CMP-1038-02277-1, "CAP 22uF 16V ±10% 1210 (3225 Metric) Thickness 2.8mm SMD", Case-EIA=1210, Case-Metric=3225, Rated Voltage="16 V", Tolerance=±10%, Max Thickness="2.8 mm", Technology=SMT
DS1: library part CMP-2000-06421-1, "LED Uni-Color Orange, 52 mW, 20 mA, -40 to 85 degC, 2-Pin SMD, RoHS, Tape and Reel", Forward Current If=20mA, Forward Voltage=2.2V, LED Colour=Orange, Manufacturer=Avago, Operating Temperature Max=85°C, Operating Temperature Min=-30°C, Operating Temperature Range=-30°Cto+85°C, Opto Case Style=SMD, Package Description="2-Pin Surface Mount Device, Body 2 x 1.25 mm, Height 0.8 mm", Package Reference=HSMX-C170, Power Dissipation Pd=52mW, Storage Temperature Min=-40°C, Bulb Size=1.25mmx1.4mm, Datasheet URL=http://docs.avagotech.com/docs/AV02-0551EN, Datasheet Version=03/2012, Dominant Wavelength=604nm, External Depth=0.8mm, External Length / Height=2mm, External Width=1.25mm, Forward Current If Max=20mA, Forward Voltage VF Max=2.2V, LED Mounting=SMD, LED Type=Standard, Lens Shape=Rectangular, Light Area Height=1.25mm, Luminous Intensity=8mcd, Luminous Intensity Typ=8mcd, Manufacturer URL=http://www.avagotech.com/, Mounting Technology=SurfaceMount, Mounting Type=SMD, MSL=MSL2A-4weeks, No. of Pins=2, Opto Mounting Orientation=Top, Package / Case=SMD, Peak Forward Current=20mA, Peak Wavelength=605nm, PIV Max=5V, Storage Temperature Max=85°C, SVHC=NoSVHC(19-Dec-2012), Viewing Angle=170°, Voltage Vf Typ=2.2V, Wavelength Typ=605nm
DS2: library part CMP-2000-05062-1, "Chip LED, Green, 2.2 V, -40 to 85 degC, 2-Pin SMD, Pb-Free, Tape and Reel", Forward Current If=20mA, Forward Voltage=2.2V, Forward Voltage VF Max=2.6V, LED Colour=Green, Manufacturer=Avago, Operating Temperature Max=85degC, Operating Temperature Min=-30degC, Operating Temperature Range=-30degCto+85degC, Opto Case Style=SMD, Package Description="2-Pin Surface Mount Device, Body 2 x 1.25 mm, Height 0.8 mm", Package Reference=HSMX-C170, Storage Temperature Min=-40degC, Bulb Size=1.25mmx1.4mm, Datasheet URL=https://datasheet.ciiva.com/29280/180495-da-01-en-chip-led-hsmg-c170-gelb-gruen-29280971.pdf, Datasheet Version=Oct-08, Dominant Wavelength=572nm, Dominant Wavelength Typ=572nm, External Depth=0.8mm, External Length / Height=2mm, External Width=1.25mm, Forward Current If Max=20mA, LED Mounting=SMD, LED Type=Standard, Lens Shape=Rectangular, Light Area Height=1mm, Luminous Intensity=15mcd, Luminous Intensity Min=4mcd, Luminous Intensity Typ=15mcd, Manufacturer URL=http://www.avagotech.com/, Mounting Type=SMD, MSL=MSL2A-4weeks, No. of Pins=2, Opto Mounting Orientation=Top, Packaging=CutTape, Peak Forward Current=20mA, Peak Wavelength=570nm, PIV Max=5V, Storage Temperature Max=85degC, SVHC=NoSVHC(16-Jun-2014), Viewing Angle=170deg, Voltage Vf Typ=2.2V, Wavelength Typ=570nm
DS3: library part CMP-2000-06427-1, "LED Uni-Color Red, 52 mW, 20 mA, -40 to 85 degC, 2-Pin SMD, RoHS, Tape and Reel", Emitting Color=Red, Forward Current=25mA, Forward Voltage=2.6V, Manufacturer=Avago, Operating Temperature Classification=Industrial, Operating Temp Range=-40Cto85C, Package Description="2-Pin Surface Mount Device, Body 1.6 x 0.8 mm, Height 0.9 mm", Package Reference=HSMX-C190, Package Type=ChipLed, Power Dissipation=52W, Reverse Voltage=5V, Test Current (It)=20mA, Chip Material=GaP, Datasheet URL=http://docs.avagotech.com/docs/AV02-0551EN, Datasheet Version=03/2012, DELETED=Compliant, Dominant Wave Length=626nm, High Brightness=No, Lens Dimensions=1x0.8x0.5mm, Lens Type=ColorlessDiffused, Luminous Intensity=10mcd, Lum Intensity=10mcd, Main Category=ChipLED, Manufacturer URL=http://www.avagotech.com/, Mounting=SurfaceMount, Mounting Technology=SurfaceMount, Number of  Elements=1, Packaging=TapeandReel, Peak Wavelength=630nm, Pin Count=2, Product Depth (mm)=0.8mm, Product Height (mm)=0.8mm, Product Length (mm)=1.6mm, Rad Hardened=No, Shape Type=Rectangular, Type=Uni-Color, Viewing Angle=170deg
F1: "3557-2 Automotive Fuse Holder Through Hole", Part Number=3557-2
H1: library part "Header 2", "Header, 2-Pin", LatestRevisionDate=17-Jul-2002, LatestRevisionNote="Re-released for DXP Platform.", Publisher="Altium Limited"
H2: library part CMP-2000-05697-1, "Male Header, Pitch 2.54 mm, 1 x 3 Position, Height 10.744 mm, Tail Length 3.175 mm, -65 to 105 degC, RoHS, Bulk", Color=Black, Manufacturer="TE Connectivity", Package Description="Male Header, Pitch 2.54 mm, 1 x 3 Position, Height 10.744 mm, Tail Length 3.175 mm", Standard Package=520, 3D Model=87224-3.pdf, Catalog Drawings="SingleSquareStraightPost /  / SingleSquareStraightPostSide", Category=Connectors,Interconnects, Connector Type=Header,Unshrouded, Contact Finish=Gold, Contact Finish Thickness=15µin(0.38µm), Contact Mating Length="0.318\"(8.08mm)", Contact Type=MalePin, Datasheet URL=http://www.te.com/commerce/DocumentDelivery/DDEController?Action=showdoc&DocId=Customer+Drawing%7F87224%7FL3%7Fpdf%7FEnglish%7FENG_CD_87224_L3.pdf%7F87224-3, Datasheet Version="Rev. L3, 08/2015", Dynamic Catalog=AMPMODUModIISeries, Family=RectangularConnectors-Headers,MalePins, Featured Product=AMPMODUConnectors, Manufacturer URL=http://www.te.com/, Mating Products="147738-2-ND / -CONNRCPT3POSVERTSMDGOLD / 147723-2-ND / -CONNRCPT3POSVERT.100GOLD / 146763-5-ND / -CONNRCPT3POSSGLVERT.100T/H / A32904-ND / -CONNRECEPT3POS.100VERTGOLD / A26922-ND / -CONNHOUSING3POS.100LOCKING / A26415-ND / -CONNRECEPT3POS.100VERTAU / A26964-ND / -CONNHOUSING3POS.100SINGLE / A3012-ND / -CONNHOUSING3POS.100SINGLE", Mounting Technology=ThroughHole, Mounting Type=ThroughHole, Number of Positions=3, Number of Positions Loaded=All, Number of Rows=1, Other Names="87224-3-ND / A26545", Package Reference=87224-3, Packaging=Bulk, Pitch="0.100\"(2.54mm)", RoHS Information=87224-3StatementofCompliance, Series=AMPMODUModII, Termination=Solder
J1: "Connector", Manufacturer_Name="Phoenix Contact", Mouser Part Number=651-1542761, RS Part Number=8025583, Allied_Number=70170366, Allied Price/Stock=https://www.alliedelec.com/phoenixcontact-1542761/70170366/, Datasheet Link=https://media.digikey.com/PDF/Data%20Sheets/Phoenix%20Contact%20PDFs/1542761.pdf, Height=18mm, Manufacturer_Part_Number=1542761, Mouser Price/Stock=https://www.mouser.com/Search/Refine.aspx?Keyword=651-1542761, RS Price/Stock=http://uk.rs-online.com/web/p/products/8025583
J2 J3: library part CMP-1559-01473-1, "OMNIMATE Signal - series BL/SL 3.50", Colour=Orange, Manufacturer=Weidmueller, Rated_current_min_no_of_poles_TU_20_deg_C="32 A", Rated_current_use_group_B_UL_1059="8 A", Rated_voltage_for_surge_voltage_class_pollution_degree_II_2="200 V", Rated_voltage_use_group_B_UL_1059="300 V", UL_94_flammability_rating=V-0, ComponentLink1Description="Manufacturer URL", ComponentLink1URL=http://www.weidmueller.com/, ComponentLink2Description="URL Link1", ComponentLink2URL=http://catalog.weidmueller.com/catalog/Start.do?localeId=en&ObjectID=1633640000, Contact_material=CuSn, Contact_surface=tinned, Insulating_material=PBT, Mounting_onto_the_PCB="Solder connection", No_of_poles=16, Outgoing_elbow=90°, PackageReference=SLD_3_50_90G_16, Packaging=Box, PartNumber=1633640000, Pitch_inch="0.138 inch", Pitch_mm="3.5 mm", Qty="20 PCS", Revision=V1, Short_text_for_material="SLD 3.50/16/90G 3.2SN OR BX", Side_termination_characteristic="closed side", Solder_pin_length_mm="3.2 mm"
J4: library part CMP-1023-00342-1, "SQ Post Socket, Through-hole, Vertical, -55 to 105 degC, 2.54mm Pitch, 8-Pin, Female, RoHS", Manufacturer=Samtec, Temperature Range="-55 to 105 degC", ComponentLink1Description="Manufacturer URL", ComponentLink1URL=http://www.samtec.com, ComponentLink2Description=Datasheet, ComponentLink2URL=http://www.samtec.com/documents/webfiles/pdf/SSW_TH.PDF, ComponentLink3Description="Package Specification", ComponentLink3URL=http://www.samtec.com/documents/webfiles/cpdf/SSW-1XX-XX-XXX-X-XX-XXX-XX-MKT.pdf, DatasheetVersion=F-214, Mounting Technology=Through-hole, Orientation=Vertical, PackageDescription="Assembly, Socket Strip .016 X .031 Tail", PackageReference=SSW-104-02-X-D, PackageVersion="CA, 6/1987", PartNumber=SSW-104-02-T-D, Pitch="2.54 mm", RoHS=True
L1: library part CMP-0007-00003-1, "Semi-shielded Power Inductor, 2.2 uH, +/- 20%, 1.8 A, -40 to 125 degC, 3 x 3 x 1.5 mm SMD, RoHS and Halogen Free, Tape and Reel", Inductance="2.2 uH", Inductance tolerance="+/- 20%", Manufacturer=Bourns, Operating Temperature="-40 to 125 degC", Rated Current="1.8 A", Resistance to Solder Heat="+260 degC for 10 sec.", ComponentLink1Description="Manufacturer URL", ComponentLink1URL=http://www.bourns.com/, ComponentLink2Description=Datasheet, ComponentLink2URL=http://www.bourns.com/data/global/pdfs/SRN3015.pdf, ComponentLink3Description="Package Specification", ComponentLink3URL=http://www.bourns.com/data/global/pdfs/SRN3015.pdf, DatasheetVersion=Aug-11, DCR Max="0.072 Ohm", Isat="1.65 A", Mounting Technology="Surface Mount", PackageDescription="2-Pin SMD, Body 3 x 3 mm, Height 1.5 mm", PackageReference=SRN3015, Packing="Tape and Reel", PartNumber=SRN3015-2R2M, RoHS=TRUE, SRF Min="90 MHz"
R1: library part CMP-2005-03490-1, "120Ohm", Manufacturer=Panasonic, Part Number=ERJ-14YJ121U
R2: library part CMP-2003-00545-1, "10k", Manufacturer=Panasonic, Part Number=ERJ-8GEYJ103V
R3 R4: library part CMP-2100-03676-1, "Chip Resistor, 10 KOhm, +/- 1%, 0.25 W, -55 to 155 degC, 1206 (3216 Metric), RoHS, Tape and Reel", Case/Package=1206, Case Code (Metric)=3216, Manufacturer=Yageo, Max Operating Temperature=155degC, Min Operating Temperature=-55degC, Package Description="2-Pin Surface Mount Device, Body 3.1 x 1.6 mm", Package Quantity=5000, Package Reference=1206.0, Power Rating=250mW, Resistance=10KOhm, Temperature Coefficient=100ppm/degreesC, Tolerance=1%, Voltage Rating=200V, Case Code (Imperial)=1206, Composition=ThickFilm, Datasheet URL=http://www.yageo.com/NewPortal/yageodocoutput?fileName=/pdf/R-Chip/PYu-RC_Group_51_RoHS_L_5.pdf, Datasheet Version="Rev. 5, 10/2016", Depth=1.6mm, Height=0.55mm, Lead Free=LeadFree, Length=3.1mm, Manufacturer URL=http://www.yageo.com/, Military Standard=Not, Packaging=TapeandReel, REACH SVHC=Unknown, RoHSCompliant=true, Termination=SMD/SMT, Width=1.6mm
R5 R6: library part CMP-2003-04896-1, Manufacturer=Yageo, Part Number=AC1206FR-074K7L
R7 R8 R9: library part CMP-2003-00580-1, Manufacturer=Panasonic, Part Number=ERJ-8GEYJ201V
R10 R11 R12: library part CMP-2003-02285-1, Manufacturer="Vishay Dale", Part Number=CRCW120656R0FKEA
SW1: library part CMP-2000-07249-1, "Tactile Switch, SPST-NO, 50 mA, 12 V, -20 to 70 degC, 4-Pin SMD, RoHS, Tape and Reel", Contact Rating @ Voltage=0.05A@12VDC, Illumination Type, Color=-, Manufacturer=E-Switch, Operating Force=260gf, Operating Temperature=-20°C~70°C, Package Description="4-Pin Surface Mount Device, Body 6 x 6 mm", Package Version="Rev. D, 10/2014", Standard Package=1, 3D Model=TL3301AFyyyyG.stp, Actuator Height off PCB, from Pins=5.00mm, Actuator Material=Polyamide(PA),Nylon, Actuator Orientation=TopActuated, Actuator Type=Standard, Catalog Drawings=TL3301xFFootprint, Category=Switches, Circuit=SPST-NO, Datasheet URL=https://www.e-switch.com/system/asset/product_line/data_sheet/185/TL3301.pdf, Datasheet Version=12/2013, Family=TactileSwitches, Featured Product=TL3301SeriesTactSwitch, Features=-, Illumination=Non-Illuminated, Illumination Voltage (Nominal)=-, Ingress Protection=-, Manufacturer URL=http://www.e-switch.ch/en/, Mechanical Life=100,000Cycles, Mounting Technology=SurfaceMount, Mounting Type=SurfaceMount, Online Catalog=TL3301Series, Other Names=EG2527DKR, Outline=6.00mmx6.00mm, Package Reference=TL3301AF260QG, Package URL=http://spec_sheets.e-switch.com/specs/P010513.pdf, Packaging=Digi-Reel®, Product Training Modules=SwitchBasics, RoHS Information=TL3301SeriesRoHSCertofCompliance, Series=TL3301, Switch Function=Off-Mom, Switch Travel=0.25mm, Termination Style=GullWing
U1: library part CMP-0243-00017-3, "ARM Cortex-M4 32-bit MCU+FPU, 210 DMIPS, 1024 kB Flash, 192 kB Internal RAM, 82 I/Os, 100-pin LQFP, -40 to 85 degC, Tray", I/Os (High Current)=82, Manufacturer=STMicroelectronics, Operating Frequency(F) (Processor speed) (MHz)=168, Supply Voltage(Vcc) max (V)=3.6, Supply Voltage(Vcc) min (V)=1.8, ComponentLink1Description="Manufacturer URL", ComponentLink1URL=http://www.st.com/web/en/home.html, ComponentLink2Description=Datasheet, ComponentLink2URL=http://www.st.com/st-web-ui/static/active/en/resource/technical/document/datasheet/DM00037051.pdf, ComponentLink3Description="Package Specification", ComponentLink3URL=http://www.st.com/st-web-ui/static/active/en/resource/technical/document/data_brief/DM00071938.pdf, Core="ARM Cortex-M4", D/A Converter=2x12-bit, DatasheetVersion="Rev. 4", FLASH Size (Prog) (kB)=1024, Internal RAM Size (kB)=192, Mounting Technology="Surface Mount", PackageDescription="100-Pin Low Profile Quad Flat Package, 14 x 14 mm Body, 0.5 mm Pitch", PackageReference=LQFP100, PackageVersion="Rev. 1, 06/2013", Packing=Tray, PartNumber=STM32F407VGT6
U2: library part CMP-0315-00046-3, "CAN Bus Transceiver, 3.3 V, -40 to 85 degC, 8-Pin SOIC (D), Green (RoHS & no Sb/Br), Tube", Generic Part Number=SN65HVD230, Supply Voltage Max="3.6 V", Supply Voltage Min="3 V", Temperature Max="85 degC", Temperature Min="-40 degC", ComponentLink1Description="Manufacturer URL", ComponentLink1URL=http://www.ti.com/, ComponentLink2Description=Datasheet, ComponentLink2URL="http://www.ti.com/general/docs/lit/getliterature.tsp?genericGeneric Part Number=SN65HVD230&fileType=pdf", DatasheetVersion=SLOS346N, Mounting Technology="Surface Mount", PackageDescription="8-Pin Plastic Small Outline, Body 4.9 x 3.9 mm, Pitch 1.27 mm", Packing=Tube, PartNumber=SN65HVD230D, RoHS=TRUE
U3: "Buck Step Down Regulator with 3 to 17 V Input and 3.3 V Output, -40 to 85 degC, 8-Pin WSON (DSG), Green (RoHS & no Sb/Br)", Manufacturer="Texas Instruments", Rating=Catalog, Switch Current Limit(Typ)(A)=1.05, Code_JEDEC=MO-229, ComponentLink1Description=Datasheet, ComponentLink1URL=http://www.ti.com/general/docs/lit/getliterature.tsp?genericPartNumber=TPS62172&fileType=pdf, ComponentLink2Description="Package Specification", ComponentLink2URL=http://www.ti.com/litv/pdf/mpds308a, ComponentLink3Description="URL Link1", ComponentLink3URL="Samples URL:http://www.ti.com/product/tps62172#samples", DatasheetVersion=SLVSAT8A, Duty Cycle(Max)(%)=100, Eco-Plan="Green (RoHS & no Sb/Br)", Iout(Max)(A)=0.5, Iq(Typ)(mA)=0.017, Mounting Technology="Surface Mount", PackageDescription="8-Pin Plastic Small Outline No-Lead, 2 x 2 x 0.8 mm Body, 0.5 mm Pitch, Exposed Pad", PackageReference=DSG8-1600X900TP, PackageVersion="revB, Oct-2010", PartNumber=TPS62172DSGR, Preset Vout(V)=3.3, Regulated Outputs(#)=1, SubFamily="Step-Down Regulator", Synchronous Rectification=TRUE, Topology=Buck, Vin(Max)(V)=17, Vin(Min)(V)=3, Vout(Max)(V)=3.3, Vout(Min)(V)=3.3
U4 U5: library part CMP-0055-01346-3, "Low Power Single Op Amp, 5-pin SOT-23, Pb-Free", Manufacturer="Texas Instruments", Package Reference=DBV0005A, PackageTopMarking=A63A*XTT, PowerWise=N, ComponentLink1Description="Datasheet URL", ComponentLink1URL=http://www.ti.com/general/docs/lit/getliterature.tsp?genericPartNumber=LM321&fileType=pdf, CompType=Amplifiers, PackageDescription="Molded SOT-23, .115 x .063 x .040 in Body, 5 Lead, .0375 in Pitch", PinCount=5, RoHS=Y
U6 U7 U8: "Smart High-Side Power Switch, 2 Channels, 1.7 A Load Current, -40 to 150 degC, PG-DSO-14-37, Reel, Green", Load Current (typ)="1.7 A", Manufacturer=Infineon, Recommended Operating Voltage Max.="20 V", Recommended Operating Voltage Min.="5.5 V", Channels=2, ComponentLink1Description="Manufacturer URL", ComponentLink1URL=http://www.infineon.com/, ComponentLink2Description=Datasheet, ComponentLink2URL=http://www.infineon.com/dgdl/BTS+4160DGA_DS2008_03_18_neu.pdf?folderId=db3a304314dca389011537739e37155f&fileId=db3a30431a5c32f2011a957ab5875685&sId=db3a30433d68e984013d7cba76cc57cb, ComponentLink3Description="Package Specification", ComponentLink3URL=http://www.infineon.com/dgdl/BTS723GWDS11_2007_09_25.pdf?folderId=db3a304314dca389011537739e37155f&fileId=db3a304331c8f8560131dbfec21b0da9&sId=db3a30443d67b5ca013d854df2f133e5, DatasheetVersion="Rev. 1.0", Green=TRUE, Group="Automotive Qualified", Halogen-free=TRUE, Mounting Technology="Surface Mount", PackageDescription="14-Pin Plastic (Green) Dual Small Outline Package, 8.65 x 3.9 mm Body, 1.27 mm Pitch", PackageReference=PG-DSO-14-37, PackageVersion=Sep-07, Packing=Reel, PartNumber=BTS4160DGA, Ptot (max)="1.4 W", RON(max) @ 150degreesC="320 mOhm", RON @ 25degreesC="160 mOhm", toff (max)="270 us", ton (max)="250 us"

## Via types
v1: diameter 1.27, hole 0.711, Top Layer to Bottom Layer, 106 vias
v2: diameter 1.8, hole 1.2, Top Layer to Bottom Layer, 5 vias
v3: diameter 0.5, hole 0.2, Top Layer to Bottom Layer, 2 vias

## Nets (pads, with @x,y where several pads share a name; then routed paths per layer and width w, separated by ;. In a path a pad name is that pad's centre, name@x,y a point inside that pad or via, vN(x,y) a via of type N, cw(c..) or ccw(c..) an arc to the next point about the centre after c; other vN are vias at no path point)
+12: C4.2 C7.1 C10.1 C18.1 C19.1 C20.1 C21.1 C22.1 C23.1 C24.1 C25.1 C26.1 C27.1 C28.1 C29.1 D1.1 F1.2 F1.4 U3.2 U3.3 U4.5 U5.5 U6.1 U6.7 U6.8 U6.14 U7.1 U7.7 U7.8 U7.14 U8.1 U8.7 U8.8 U8.14 | length 243.8
  Top Layer w0.127: U7.14 12.549,28.906 U7.14@12.767,29.124 ; D1.1@63.363,58.42 D1.1
  Top Layer w0.254: U7.8@4.929,28.663 3.594,28.663 3.568,28.637 2.903,28.637 2.711,28.829 1.651,28.829 1.651,36.587 3.144,38.08 3.165,38.08 3.81,38.725 C26.1 ; U7.7@4.94,34.013 4.94,38.24 4.572,38.608 4.001,38.608 C26.1 ; v1(10.541,40.005) 5.016,40.005 4.286,39.275 4.212,39.275 3.81,38.873 C26.1 ; U7.14 13.763,28.713 15.063,30.012 15.137,30.012 15.539,30.415 C29.1 15.539,30.563 15.941,30.965 16.741,30.965 20.574,34.798 ; U7.1@12.549,34.063 14.099,35.612 15.237,35.612 15.639,36.015 C28.1 18.689,36.089 ; 20.574,36.068 20.574,34.798 ; C22.1 22.739,37.015 22.337,36.612 22.263,36.612 21.739,36.089 18.689,36.089 ; v1(25.019,37.973) 20.573,37.973 18.689,36.089 ; U6.8@25.303,28.537 25.303,28.956 25.169,29.09 24.648,29.09 23.549,30.189 C23.1 22.639,32.733 20.574,34.798 ; C10.1 27.115,43.879 27.655,44.419 29.704,44.419 U8.7 ; v1(27.559,37.719) 27.675,37.719 28.215,37.179 37.168,37.179 C19.1@39.122,39.133 ; C18.1 28.969,37.909 29.718,38.658 U8.8 ; U6.14 35.615,28.613 C25.1 ; U6.1 32.973,33.937 C24.1 36.842,32.834 36.842,29.166 36.238,28.563 35.639,28.563 34.854,27.778 34.854,19.812 ; C24.1@35.713,33.963 37.392,33.963 40.513,37.084 v1(42.545,37.084) 42.799,37.084 46.99,41.275 v1(46.99,45.085) ; U5.5@36.944,12.761 36.944,14.672 C21.1 36.007,16.641 34.854,17.794 34.854,19.812 ; U8.14 C19.1@39.122,39.133 ; U8.1 39.349,44.433 39.751,44.031 C7.1 ; v1(39.433,39.37) 39.359,39.37 C19.1@39.122,39.133 ; U4.5@46.944,12.767 46.007,13.703 46.007,16.167 44.696,17.478 44.696,19.168 44.053,19.812 34.854,19.812 ; 56.693,80.63 57.683,79.639 ; U3.2@59.652,79.409 57.914,79.409 57.683,79.639 ; U3.3@59.69,78.994 U3.2@59.69,79.375 ; 62.103,58.42 57.683,62.84 57.683,79.639
  Top Layer w0.381: C22.1@22.739,36.957 23.368,36.957 24.327,35.998 24.327,35.389 25.329,34.388 U6.7 ; C24.1@35.713,33.963 C24.1 ; C4.2 56.693,80.63 ; F1.4@57.404,58.039 57.785,58.42 62.103,58.42 D1.1@63.363,58.42
  Bottom Layer w0.254: v1@10.287,40.005 v1(10.541,40.005) 11.684,40.005 v1(15.621,36.068) ; v1(26.416,43.815) 26.035,43.815 25.019,42.799 v1(25.019,37.973) 25.019,37.719 25.146,37.592 v1@27.813,37.592 ; v1(39.433,39.37) v1@39.497,39.306 ; v1@39.497,38.989 v1@39.497,39.306 ; v1(39.814,44.577) 40.005,44.577 40.513,45.085 v1(46.99,45.085) 50.8,48.895 50.8,56.261 52.162,57.623 52.404,57.623 52.578,57.797 F1.2@52.578,58.039 ; v1@42.291,37.338 v1(42.545,37.084) 41.719,37.084 v1@39.497,39.306
  Bottom Layer w0.381: F1.2@52.578,58.039 F1.4@57.404,58.039
GND: C1.2 C2.2 C3.2 C4.1 C5.2 C6.1 C7.2 C8.1 C9.1 C10.2 C11.1 C12.1 C13.1 C14.2 C15.2 C16.2 C17.2 C18.2 C19.2 C20.2 C21.2 C22.2 C23.2 C24.2 C25.2 C26.2 C27.2 C28.2 C29.2 D1.2 DS1.2 DS2.2 DS3.2 H2.1 J1.3 J2.A2 J2.B2 J2.B4 J2.B6 J2.B8 J3.A2 J4.1 J4.3 K1.2 K2.2 K3.2 R2.2 R5.1 R6.1 SW1.3 SW1.4 U1.10 U1.20 U1.27 U1.74 U1.94 U1.99 U2.2 U3.1 U3.4 U3.5 U3.8 U3.9 U4.2 U5.2 U6.2 U7.2 U8.2 | length 66.3
  Top Layer w0.127: C15.2@24.57,78.613 24.57,81.395 24.582,81.407 v1(24.737,81.407) ; U5.2 34.412,11.938 35.359,11.938 35.433,12.012 35.433,14.531 34.895,15.069 34.895,15.143 34.429,15.608 C21.2 ; v1(34.29,72.644) C11.1@34.29,72.956 ; v1(42.545,10.795) 43.458,11.708 U4.2 ; U3.4@59.514,78.43 U3.4 60.273,78.43 v3(60.623,78.78) 61.044,78.359 U3.5@61.444,78.359 ; U3.1@59.514,79.93 U3.1 60.273,79.93 v3(60.623,79.58) ; U3.9@60.942,79.816 61.136,80.01 U3.8@61.453,80.01
  Top Layer w0.254: v1(8.382,47.879) 8.382,48.014 SW1.3 ; v1(9.77,74.228) 11.296,74.228 11.894,74.826 11.968,74.826 12.37,75.228 v1(12.37,75.302) 14.07,73.602 U1.27 ; U7.2@11.279,34.063 v1(11.279,35.75) ; v1(14.859,54.991) 14.259,54.991 14.258,54.99 C1.2 ; SW1.4 17.566,48.006 v1(17.526,48.006) ; U1.20 19.57,78.566 20.447,79.443 20.193,79.697 v1(20.193,79.883) ; C15.2@24.511,78.613 C15.2@24.57,78.613 ; U1.10 C15.2@24.57,78.613 ; v1(26.797,42.227) C10.2@27.051,41.973 ; U1.74 28.57,59.002 29.401,58.171 v1(29.401,57.531) ; v1(28.892,80.01) 26.776,80.01 25.379,78.613 C15.2@24.57,78.613 ; U1.99 32.157,73.602 ; v1(31.242,35.56) 31.242,34.399 U6.2@31.679,33.963 ; U1.94@31.623,71.12 31.877,71.12 32.157,71.4 32.157,73.602 ; C11.1@34.29,72.956 33.644,73.602 32.157,73.602 ; v1@36.068,41.656 U8.2 ; v1(59.273,65.456) 59.464,65.265 U2.2 64.254,65.271 65.652,65.271 65.659,65.278 67.157,65.278 67.564,65.685 67.564,69.145 R2.2@67.413,69.295 ; U3.9@60.942,78.861 60.942,78.544 U3.9@60.946,78.54 ; U3.9@60.942,79.499 U3.9@60.942,79.816 ; D1.2 v1(67.709,58.694) ; K2.2@69.723,27.123 v1(69.723,27.153) ; K1.2@80.93,26.797 v1(81.042,26.797)
  other v1: 33.656,5.817 43.656,5.817 44.323,14.986 34.163,15.621 61.468,26.772 22.639,28.537 15.539,28.837 35.639,30.289 2.667,30.29 15.639,34.437 22.739,35.437 35.739,35.589 3.81,37.084 41.085,39.37 27.559,39.561 35.941,41.91 39.751,42.354 11.43,57.531 34.417,58.166 10.17,61.476 38.354,73.648 43.18,73.948 48.006,73.948 59.173,75.73 55.373,77.83
  other v2: 76.708,44.704
NetC1_1: C1.1 J4.2 SW1.1 SW1.2 U1.14 | length 62.6
  Top Layer w0.127: SW1.1 SW1.2 17.496,52.576 C1.1 ; U1.14 22.57,69.251 v1(22.606,69.215) ; v1(43.18,54.991) 43.18,53.721 J4.2@44.323,52.578
  Bottom Layer w0.127: v1(22.606,69.215) 22.606,61.341 18.034,56.769 v1(18.034,54.864) 20.061,54.864 20.455,55.258 42.913,55.258 v1(43.18,54.991)
NetC2_1: C2.1 U1.49 | length 5.5
  Top Layer w0.254: C2.1 13.519,63.128 14.045,62.602 U1.49
NetC3_1: C3.1 U1.73 | length 3.3
  Top Layer w0.254: C3.1@27.644,57.373 28.07,57.799 U1.73
NetDS1_1: DS1.1 R10.1 | length 1.9
  Top Layer w0.127: R10.1 DS1.1
NetDS2_1: DS2.1 R11.1 | length 1.9
  Top Layer w0.127: R11.1 DS2.1
NetDS3_1: DS3.1 R12.1 | length 2.2
  Top Layer w0.127: R12.1 DS3.1
NetF1_1: F1.1 F1.3 J1.2 | length 21.2
  Bottom Layer w0.381: F1.1@54.004,44.569 57.404,44.569 59.769,42.204 v2(74.208,42.204)
NetH1_1: H1.1 R1.2 | length 3.9
  Top Layer w0.127: H1.1 79.073,63.13 R1.2
NetH1_2: H1.2 J1.5 U2.6 | length 31.4
  Top Layer w0.127: J1.5@74.061,44.557 65.913,52.705 65.913,61.023 68.885,63.995 U2.6 73.468,63.995 H1.2
  other v2: 74.208,44.704
NetH2_2: H2.2 U1.24 | length 16.1
  Top Layer w0.254: v1(15.494,76.327) 16.256,77.089 17.272,77.089 17.57,76.791 U1.24
  Bottom Layer w0.381: H2.2 8.763,78.74 13.843,78.74 15.403,77.18 15.403,76.418 v1(15.494,76.327)
NetH2_3: H2.3 U1.23 | length 28.2
  Top Layer w0.254: 18.07,74.132 U1.23
  Top Layer w0.381: 18.07,74.132 18.796,73.406 v1(18.796,73.152)
  Bottom Layer w0.381: H2.3@5.588,78.359 3.048,75.819 3.048,71.12 3.556,70.612 10.668,70.612 13.208,73.152 v1(18.796,73.152)
NetJ1_4: J1.4 R1.1 U2.7 | length 35.8
  Top Layer w0.127: U2.7 71.488,65.265 74.778,68.555 R1.1 79.253,68.555 79.609,68.199 80.264,68.199 80.791,67.672 80.791,62.122 74.208,55.539 v2(74.208,47.204)
NetJ2_A3: J2.A3 U6.12 U6.13 | length 41.7
  Top Layer w0.127: v1(30.607,9.271) 30.619,25.109 ; 30.607,25.146 30.409,25.344 30.409,28.563 U6.13@31.679,28.563
  Bottom Layer w0.127: J2.A3 11.811,9.271 v1(30.607,9.271)
NetJ2_A4: J2.A4 U6.9 U6.10 | length 32.2
  Top Layer w0.127: J2.A4 13.97,10.922 15.367,9.525 17.907,9.525 18.669,10.287 18.669,16.002 20.193,17.526 25.273,17.526 27.869,20.122 27.869,28.563 U6.9@26.599,28.563
NetJ2_A5: J2.A5 U7.9 U7.10 | length 25.7
  Top Layer w0.127: U7.9@6.199,28.663 7.469,28.663 7.469,23.299 7.989,22.779 7.989,15.506 10.414,13.081 15.001,13.081 J2.A5
NetJ2_A6: J2.A6 U8.9 U8.10 U8.12 U8.13 | length 40.9
  Top Layer w0.254: U8.9@30.988,38.498 30.966,39.111 v1(30.966,38.249) v1@31.077,38.138 ; v1@31.187,38.028 v1@31.077,38.138 ; v1@31.263,38.138 v1@31.077,38.138
  Top Layer w0.4: J2.A6 22.479,12.741 v1(22.479,14.097) ; v1@31.187,38.028 31.26,37.955 35.161,37.955 35.314,38.108 ; v1@31.263,38.138 U8.10 ; U8.12@34.798,38.625 35.314,38.109 ; U8.13@36.068,38.625 35.831,38.625 35.473,38.267 35.314,38.108
  Bottom Layer w0.4: v1(22.479,14.097) 22.479,24.511 27.051,29.083 27.051,33.031 30.966,36.947 v1(30.966,38.249)
NetJ2_B1: J2.B1 R3.2 U4.4 | length 57.8
  Top Layer w0.127: R3.2 43.656,17.942 40.894,15.179 v1(40.894,13.462) 44.577,13.462 46.736,11.303 U4.4@46.736,10.795
  Bottom Layer w0.127: J2.B1 3.451,15.922 7.927,11.447 7.927,10.615 10.541,8.001 36.703,8.001 40.894,12.192 40.894,13.208 v1@41.148,13.462
NetJ2_B3: J2.B3 R4.2 U5.4 | length 39
  Bottom Layer w0.127: J2.B3 10.16,15.621 12.827,12.954 28.575,12.954 31.877,9.652 v1(33.02,9.652) ; v1(33.731,18.117) 32.639,17.024 32.639,10.033 v1(33.02,9.652) ; v1(36.835,10.861) 35.626,9.652 v1(33.02,9.652)
NetJ2_B5: J2.B5 U1.34 | length 58.3
  Top Layer w0.127: U1.34 17.575,70.102 18.669,69.008 v1(18.669,65.024)
  Bottom Layer w0.127: J2.B5 17.272,16.034 17.272,45.974 16.256,46.99 16.256,57.105 16.178,57.183 16.178,62.224 18.669,64.715 v1(18.669,65.024)
NetJ2_B7: J2.B7 U1.77 | length 73.9
  Top Layer w0.127: U1.77 36.077,62.602 36.83,61.849 v1(37.592,61.849) ; v1(36.195,22.225) 36.195,22.479 48.133,34.417 48.133,45.217 47.363,45.987 47.358,45.987 47.244,46.101 47.244,57.404 43.942,60.706 v1(42.799,60.706)
  Bottom Layer w0.127: J2.B7 30.463,22.225 v1(36.195,22.225) ; v1(37.592,61.849) 41.656,61.849 v1(42.799,60.706)
NetJ3_A1: J3.A1 U1.33 | length 126
  Top Layer w0.127: U1.33 12.817,70.602 1.143,58.928 1.143,10.922 8.255,3.81 v1(35.306,3.81)
  Bottom Layer w0.127: v1(35.306,3.81) 47.233,3.81 J3.A1
NetJ3_A3: J3.A3 U1.81 | length 88.1
  Top Layer w0.127: v1(27.481,64.586) 27.497,64.602 U1.81 ; v1(43.18,64.516) 43.18,63.95 47.612,59.518 47.612,47.384 58.166,36.83 58.166,34.036 51.562,27.432 51.562,16.129 53.975,13.716 58.183,13.716 J3.A3
  Bottom Layer w0.127: v1(27.481,64.586) 27.552,64.516 v1(43.18,64.516)
NetJ3_A4: J3.A4 U7.12 U7.13 | length 64.6
  Top Layer w0.127: U7.13@11.279,28.663 10.009,28.663 10.009,27.338 11.057,26.289 v1(26.67,26.289)
  Bottom Layer w0.127: v1(26.67,26.289) 27.432,25.527 50.292,25.527 59.563,16.256 59.563,15.367 60.833,14.097 61.302,14.097 J3.A4
NetJ3_B1: J3.B1 K3.3 | length 9.3
  Top Layer w0.127: J3.B1 54.854,15.738 59.588,20.472 K3.3
NetJ3_B2: J3.B2 K3.4 | length 8.4
  Top Layer w0.127: J3.B2 59.045,15.738 63.242,19.935 63.671,19.935 64.008,20.272 K3.4
NetJ3_B3: J3.B3 K1.3 | length 26.3
  Top Layer w0.127: J3.B3 63.056,13.843 79.502,13.843 80.899,15.24 K1.3
NetJ3_B4: J3.B4 K1.4 | length 26.3
  Top Layer w0.127: J3.B4 66.226,14.173 79.07,14.173 80.137,15.24 80.137,21.087 80.389,21.339 82.039,21.339 82.369,21.009 83.102,21.009 83.439,20.672 K1.4
NetJ3_B5: J3.B5 K2.3 | length 5.8
  Top Layer w0.127: J3.B5 69.723,17.3 K2.3
NetJ3_B6: J3.B6 K2.4 | length 5.4
  Top Layer w0.127: J3.B6 71.926,16.003 71.926,20.516 K2.4
NetJ4_4: J4.4 U1.89 | length 35.1
  Top Layer w0.127: v1(28.448,68.58) 30.648,68.58 U1.89 ; J4.4@41.529,51.816 v1(41.529,58.547)
  Bottom Layer w0.127: v1(28.448,68.58) 28.448,68.197 25.908,65.657 25.908,59.937 26.777,59.068 34.79,59.068 35.565,58.293 41.275,58.293 v1(41.529,58.547)
NetJ4_6: J4.6 U1.76 | length 17.8
  Top Layer w0.127: U1.76 U1.76 31.179,61.595 v1(32.639,61.595) ; J4.6 39.497,52.959 39.37,53.086 v1(39.37,60.452)
  Bottom Layer w0.127: v1(32.639,61.595) 34.613,61.595 35.756,60.452 v1(39.37,60.452)
NetJ4_8: J4.8 U1.72 | length 15.5
  Top Layer w0.127: U1.72 27.57,59.193 26.719,58.342 26.719,56.847 27.178,56.388 31.115,56.388 35.179,52.324 J4.8
NetK1_1: K1.1 R7.2 | length 4.7
  Top Layer w0.127: K1.1 83.693,27.026 83.693,31.178 R7.2@83.852,31.337
NetK2_1: K2.1 R8.2 | length 4
  Top Layer w0.127: R8.2@72.191,31.115 72.191,27.225 K2.1
NetK3_1: K3.1 R9.2 | length 5.1
  Top Layer w0.127: K3.1 64.083,26.847 R9.2
NetL1_1: L1.1 U3.7 | length 4.8
  Top Layer w0.127: U3.7 62.031,79.43
  Top Layer w0.254: 62.031,79.43 63.131,80.53 L1.1
NetR2_1: R2.1 U2.8 | length 3
  Top Layer w0.127: U2.8 70.298,66.935 R2.1
NetR3_1: R3.1 R5.2 U4.3 | length 17.4
  Top Layer w0.127: U4.3 44.31,10.758 44.522,10.547 44.522,10.428 45.297,9.652 47.752,9.652 ; R3.1@46.631,18.217 46.631,17.051 47.879,15.804 47.879,11.684 47.752,11.557 47.752,10.922 ; R5.2@46.706,5.817 47.752,6.862 47.752,9.652 ; 47.752,10.867 47.752,9.652
NetR4_1: R4.1 R6.2 U5.3 | length 19.9
  Top Layer w0.127: U5.3 34.285,8.641 R6.2@36.848,6.078 ; R4.1@36.631,18.117 36.631,17 37.959,15.672 37.959,6.586 37.451,6.078 R6.2@36.944,6.078 ; R6.2@36.706,5.817 36.706,6.078 R6.2@36.848,6.078 ; R6.2@36.848,6.078 36.944,5.982 R6.2@36.944,6.078 ; R6.2@36.848,6.078 R6.2@36.944,6.078
NetR7_1: R7.1 U1.54 | length 78.3
  Top Layer w0.127: U1.54@18.542,59.563 18.542,59.309 19.926,57.925 19.926,53.729 20.828,52.827 v1(20.828,52.705) ; v1(48.514,54.356) 58.335,54.356 R7.1
  Bottom Layer w0.127: v1@20.595,52.623 20.677,52.705 v1(20.828,52.705) ; v1@20.698,52.451 22.337,54.089 43.553,54.089 43.82,54.356 v1(48.514,54.356)
NetR8_1: R8.1 U1.58 | length 66.8
  Top Layer w0.127: U1.58 20.57,54.614 v1(20.828,54.356)
  Bottom Layer w0.127: v1(20.828,54.356) 20.828,54.234 20.706,54.234 19.926,53.454 19.926,52.332 28.672,43.586 49.124,43.586 59.563,33.147 67.818,33.147 69.13,31.835 v1(69.541,31.835)
NetR9_1: R9.1 U1.55 | length 65
  Top Layer w0.127: v1(19.05,62.738) 19.07,62.718 U1.55
  Bottom Layer w0.127: v1(19.05,62.738) 19.05,62.556 19.177,62.429 16.94,60.192 16.94,57.499 17.132,57.307 17.132,54.491 28.367,43.256 47.93,43.256 59.309,31.877 v1(61.214,31.877)
NetR10_2: R10.2 U1.86 | length 18.6
  Top Layer w0.127: U1.86 35.895,67.102 37.338,65.659 46.435,65.659 R10.2
NetR11_2: R11.2 U1.87 | length 13.6
  Top Layer w0.127: U1.87 36.03,67.602 37.465,66.167 42.117,66.167 42.614,66.664 42.614,66.843 43,67.23 R11.2
NetR12_2: R12.2 U1.88 | length 8.2
  Top Layer w0.127: U1.88 37.482,68.102 37.788,67.796 37.788,67.617 38.174,67.23 R12.2
NetU1_29: U1.29 U4.1 | length 121.7
  Top Layer w0.127: U1.29 14.161,72.602 0.728,59.169 0.629,10.42 8.382,2.667 8.636,2.667 35.814,2.667 38.608,5.461 38.608,8.636 42.624,12.652 U4.1@44.085,12.652
NetU1_30: U1.30 U5.1 | length 76.3
  Top Layer w0.127: U1.30 18.668,72.102 19.939,70.832 v1(19.939,66.802) ; v1(24.511,31.623) 30.607,31.623 32.258,29.972 32.258,28.027 32.766,27.519 v1(32.766,26.67) ; v1@32.765,27.152 32.765,14.156 34.16,12.761 U5.1
  Bottom Layer w0.127: v1(19.939,66.802) 19.939,64.516 19.304,63.881 18.699,63.881 16.559,61.741 16.559,57.341 16.637,57.263 16.637,48.392 16.624,48.379 16.624,47.089 17.602,46.111 17.602,45.837 17.602,45.517 17.602,43.993 24.511,37.084 v1(24.511,31.623)
NetU1_60: U1.60 U8.3 U8.5 | length 24.6
  Top Layer w0.127: U1.60 21.59,60.482 v1(21.59,58.42) ; v1(23.495,58.039) 23.495,56.007 32.258,47.244 32.258,45.593 ; U8.5 32.258,45.593 ; U8.3 34.798,44.704 33.909,45.593 32.258,45.593
  Bottom Layer w0.127: v1(21.59,58.42) 21.78,58.229 23.304,58.229 v1(23.495,58.039)
NetU1_62: U1.62 U6.5 | length 28.7
  Top Layer w0.127: U1.62 22.57,43.041 26.289,39.322 26.289,36.322 27.165,35.446 27.165,34.495 U6.5@27.73,33.93
NetU1_70: U1.70 U2.4 | length 46
  Top Layer w0.127: v1(25.4,58.166) 26.57,59.336 U1.70
  Bottom Layer w0.127: v1(25.4,58.166) 25.4,56.896 26.289,56.007 44.704,56.007 51.181,62.484 v1(64.262,62.484)
NetU1_71: U1.71 U2.1 | length 42
  Top Layer w0.127: v1(27.051,62.738) 27.051,60.521 U1.71
  Bottom Layer w0.127: v1(27.051,62.738) 27.195,62.738 27.341,62.592 28.757,64.008 41.148,64.008 42.824,62.332 48.997,62.332 53.721,67.056 v1(63.5,67.056)
NetU1_84: U1.84 U6.3 | length 53.7
  Top Layer w0.127: U6.3@30.48,34.417 30.34,34.557 30.34,35.933 31.11,36.703 39.575,36.703 40.35,37.478 41.664,37.478 45.72,41.534 45.72,46.528 46.885,47.693 46.885,54.48 35.263,66.102 U1.84
NetU1_92: U1.92 U7.3 | length 51.1
  Top Layer w0.127: v1(9.525,36.068) 9.525,35.179 10.033,34.671 U7.3@10.033,34.163 ; v1(27.813,70.104) U1.92@30.67,70.104